# Altium PCB royal_esc.PcbDoc
Units mm, origin at the board's own origin, x right, y up, seen from the top; angles counter-clockwise.
Board outline 41.91 x 30.48 mm, 4 copper layers (Top S.Layer, GND, VCC, Bottom S.Layer), stack 1.571 mm thick; 70 components, 42 nets, 184 pads, 155 vias.
Unrouted connection lines stored in the file: 1.
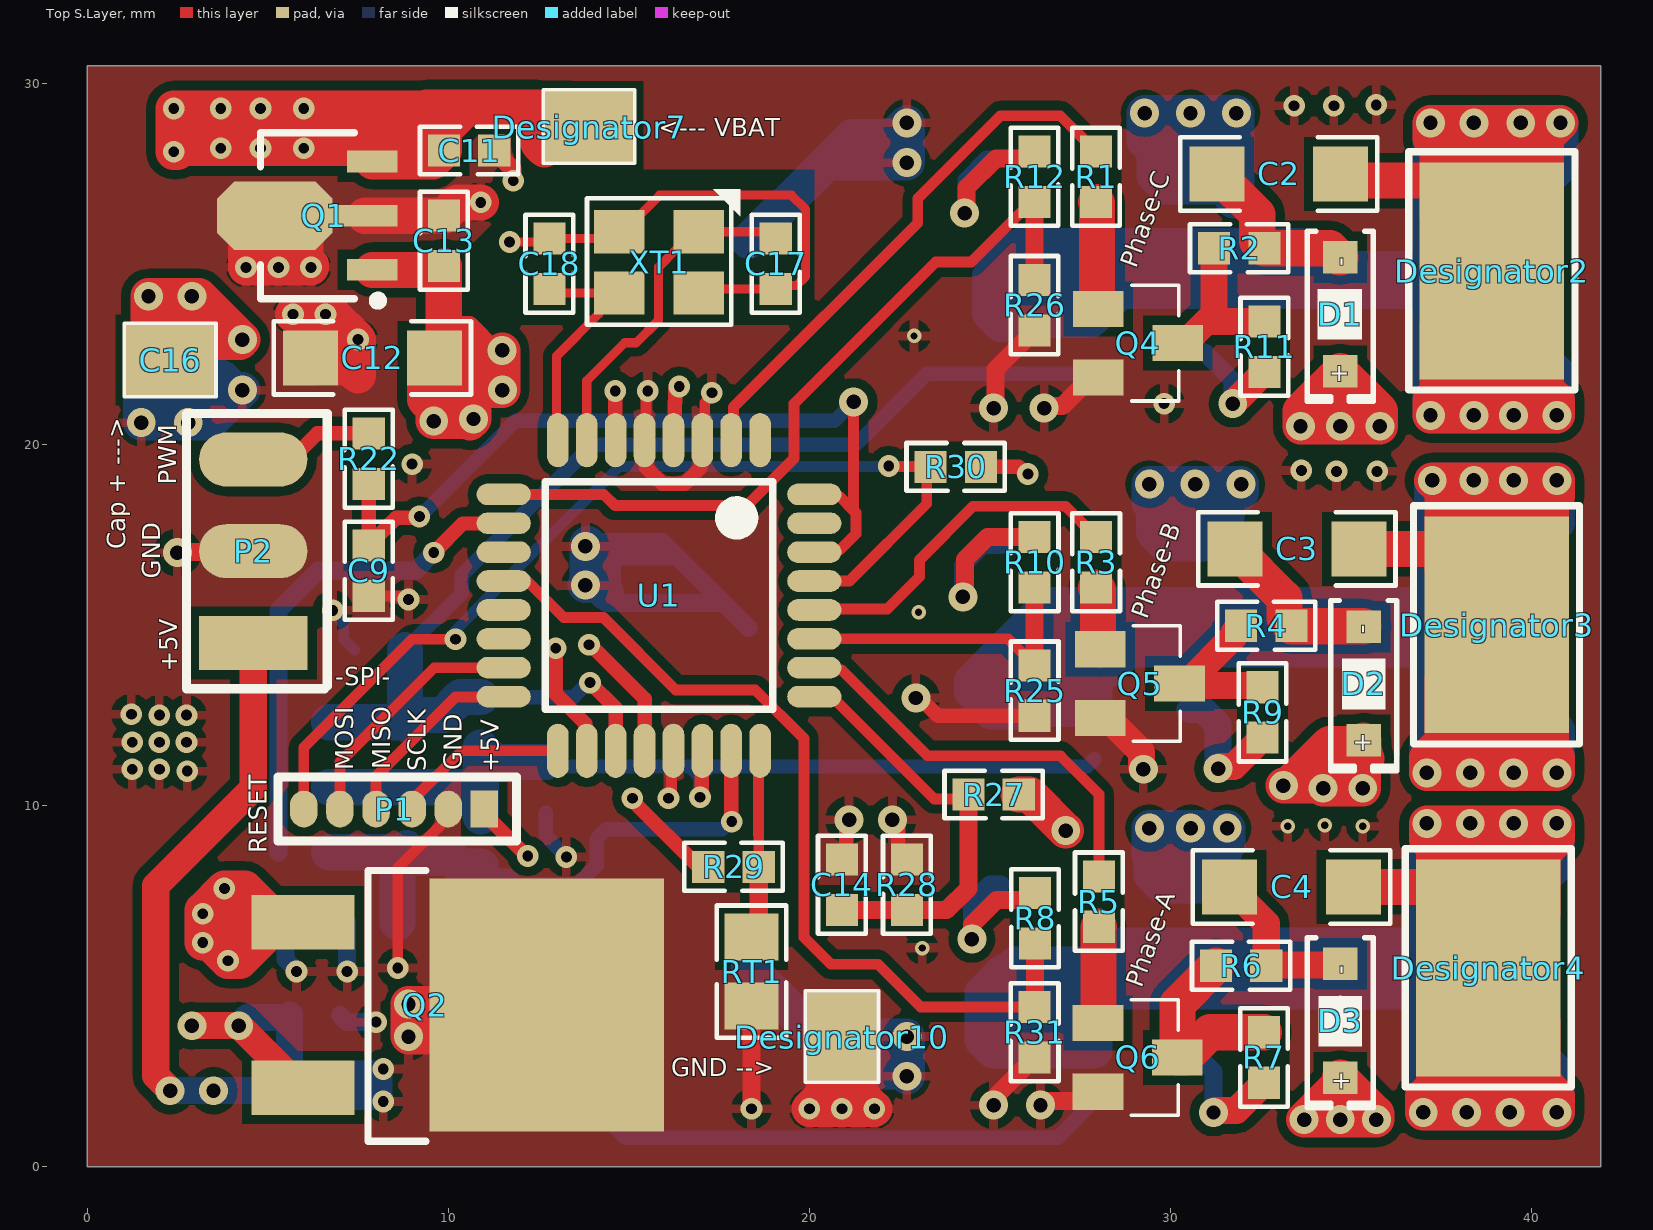
[diagram p0: Top S.Layer view]
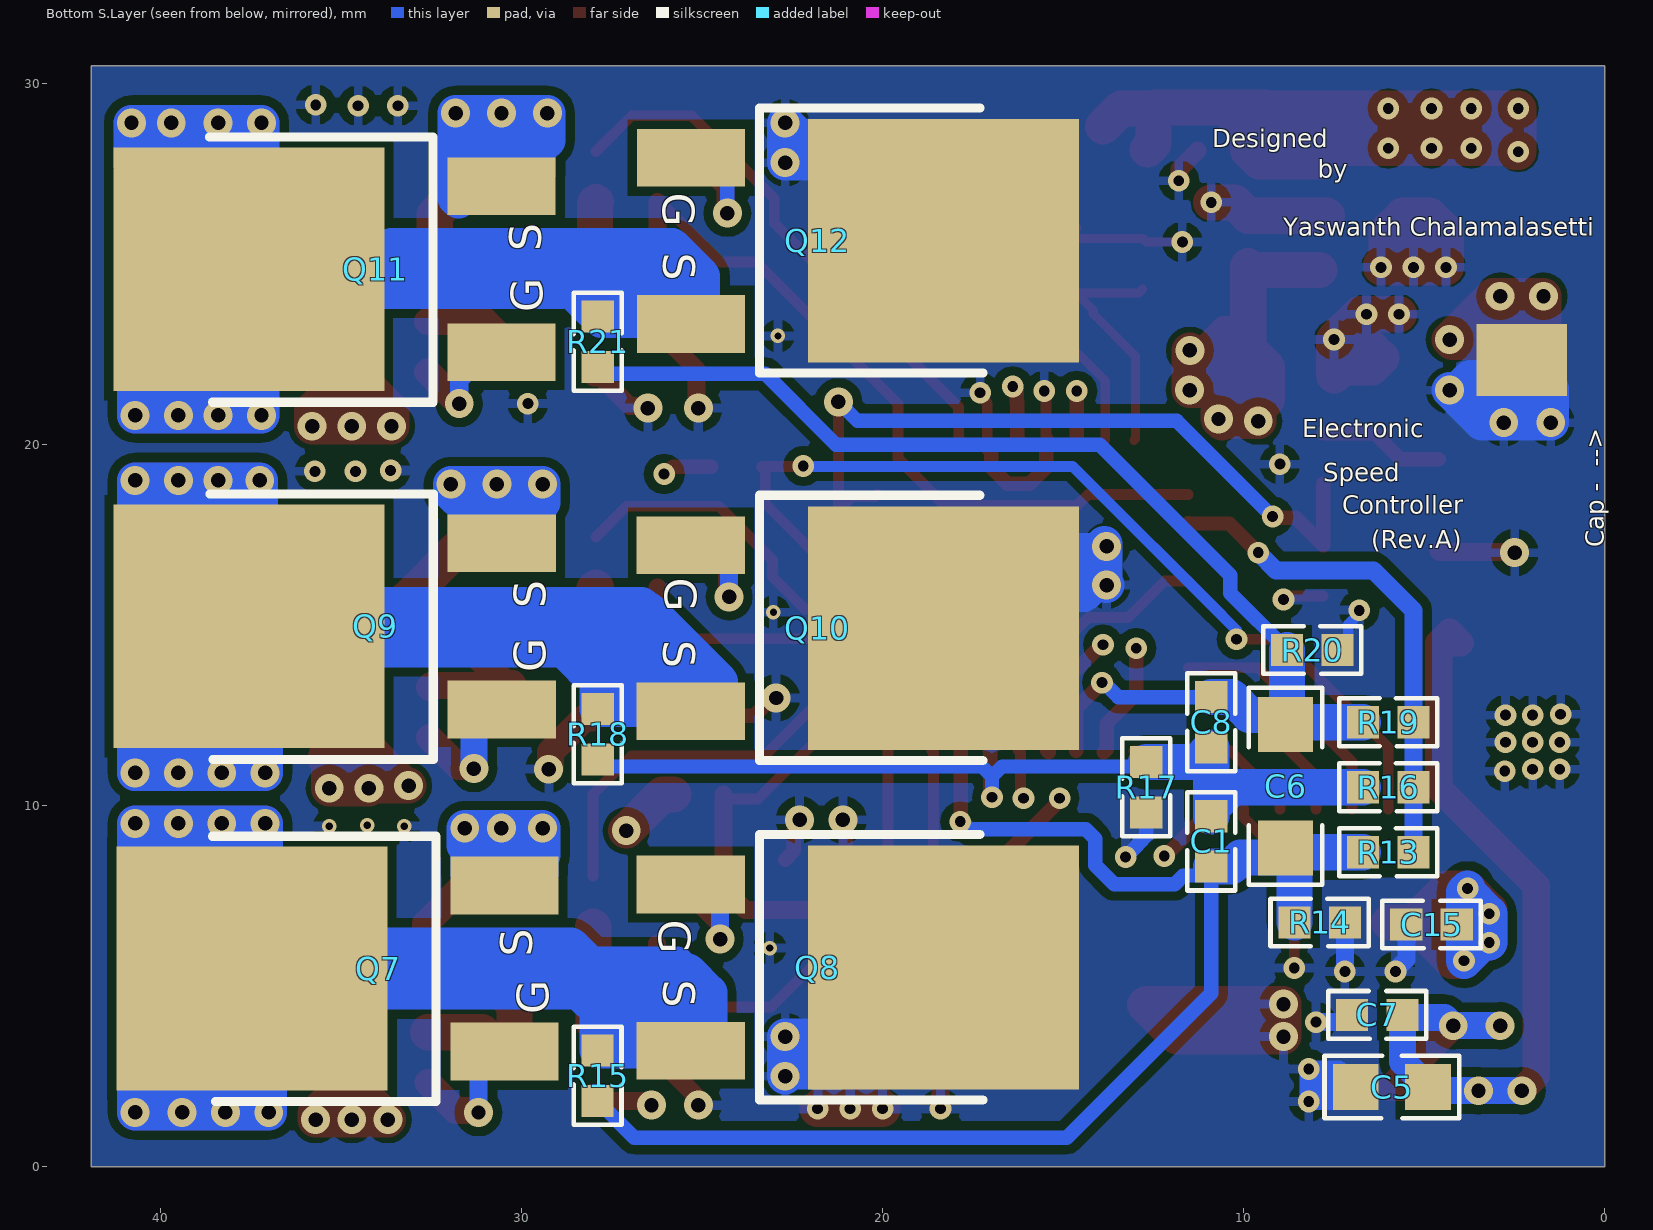
[diagram p1: Bottom S.Layer view, seen from below]
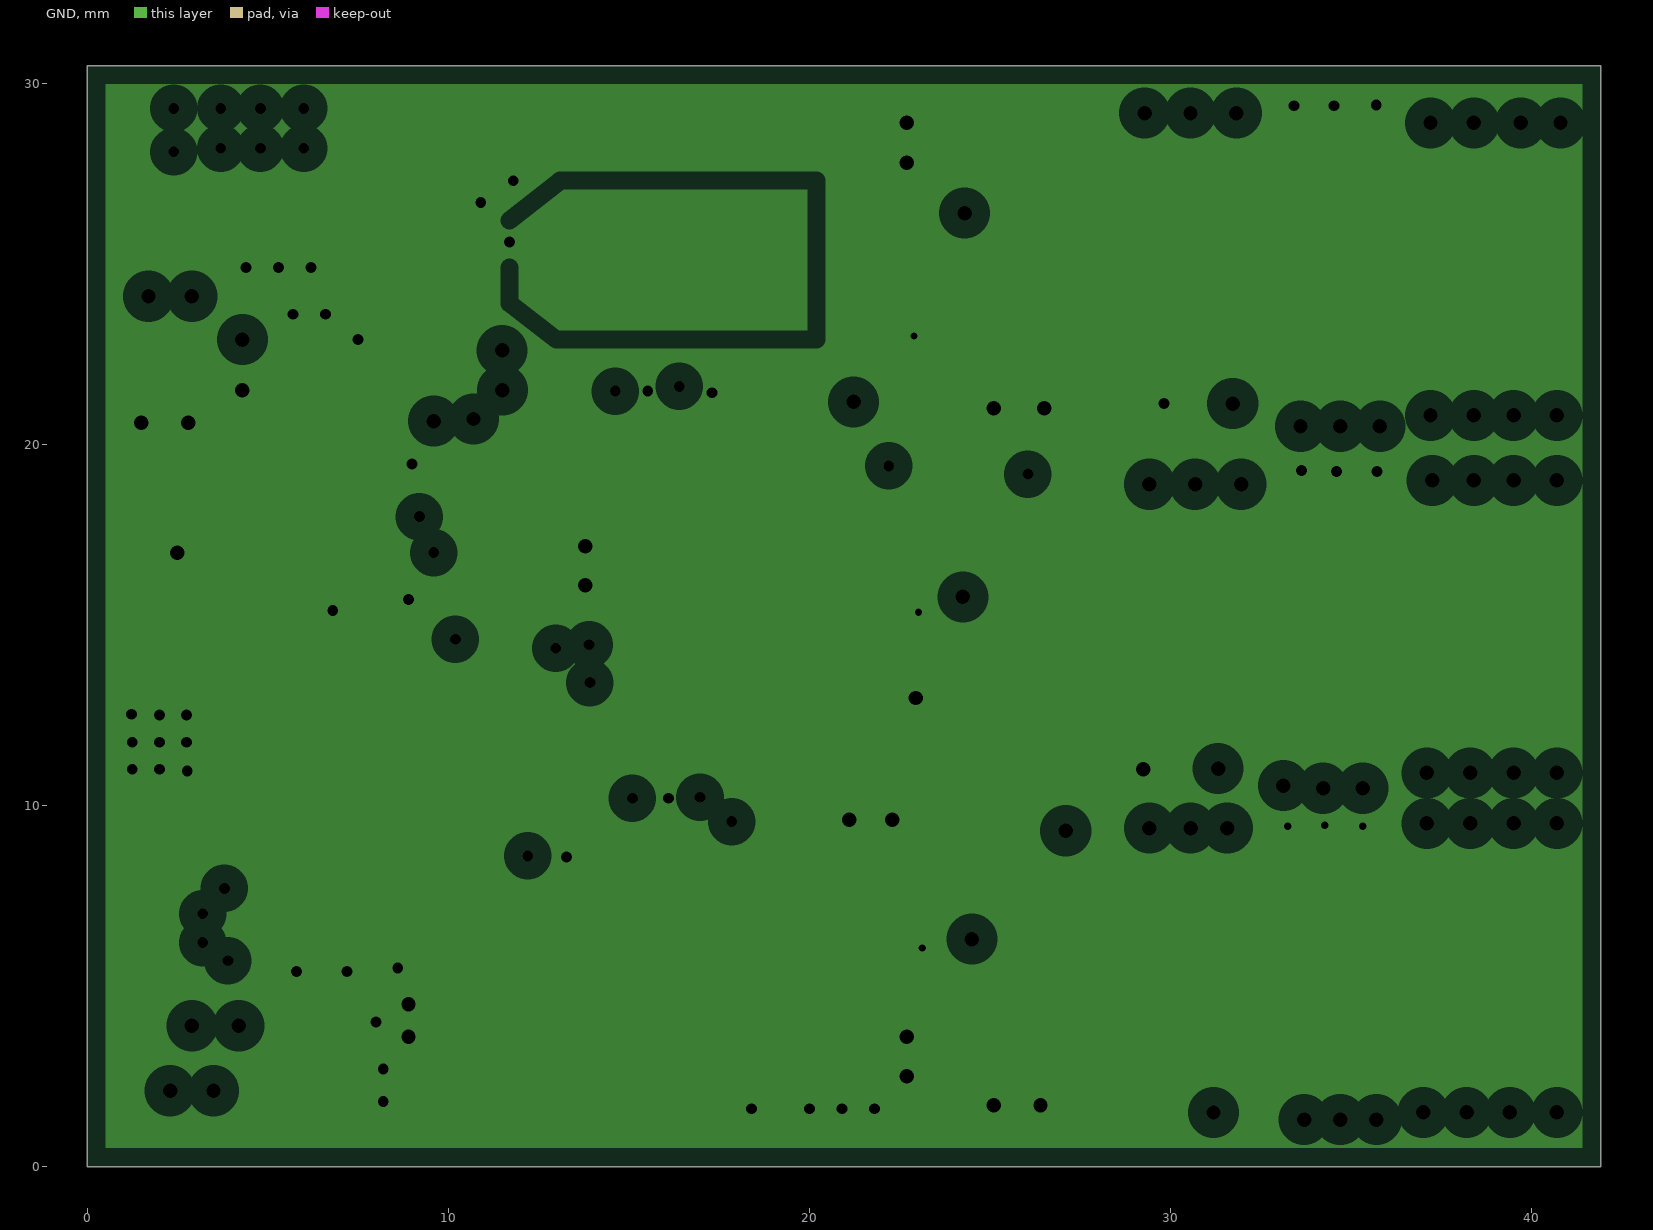
[diagram p2: GND, clearances drawn from the general rule]
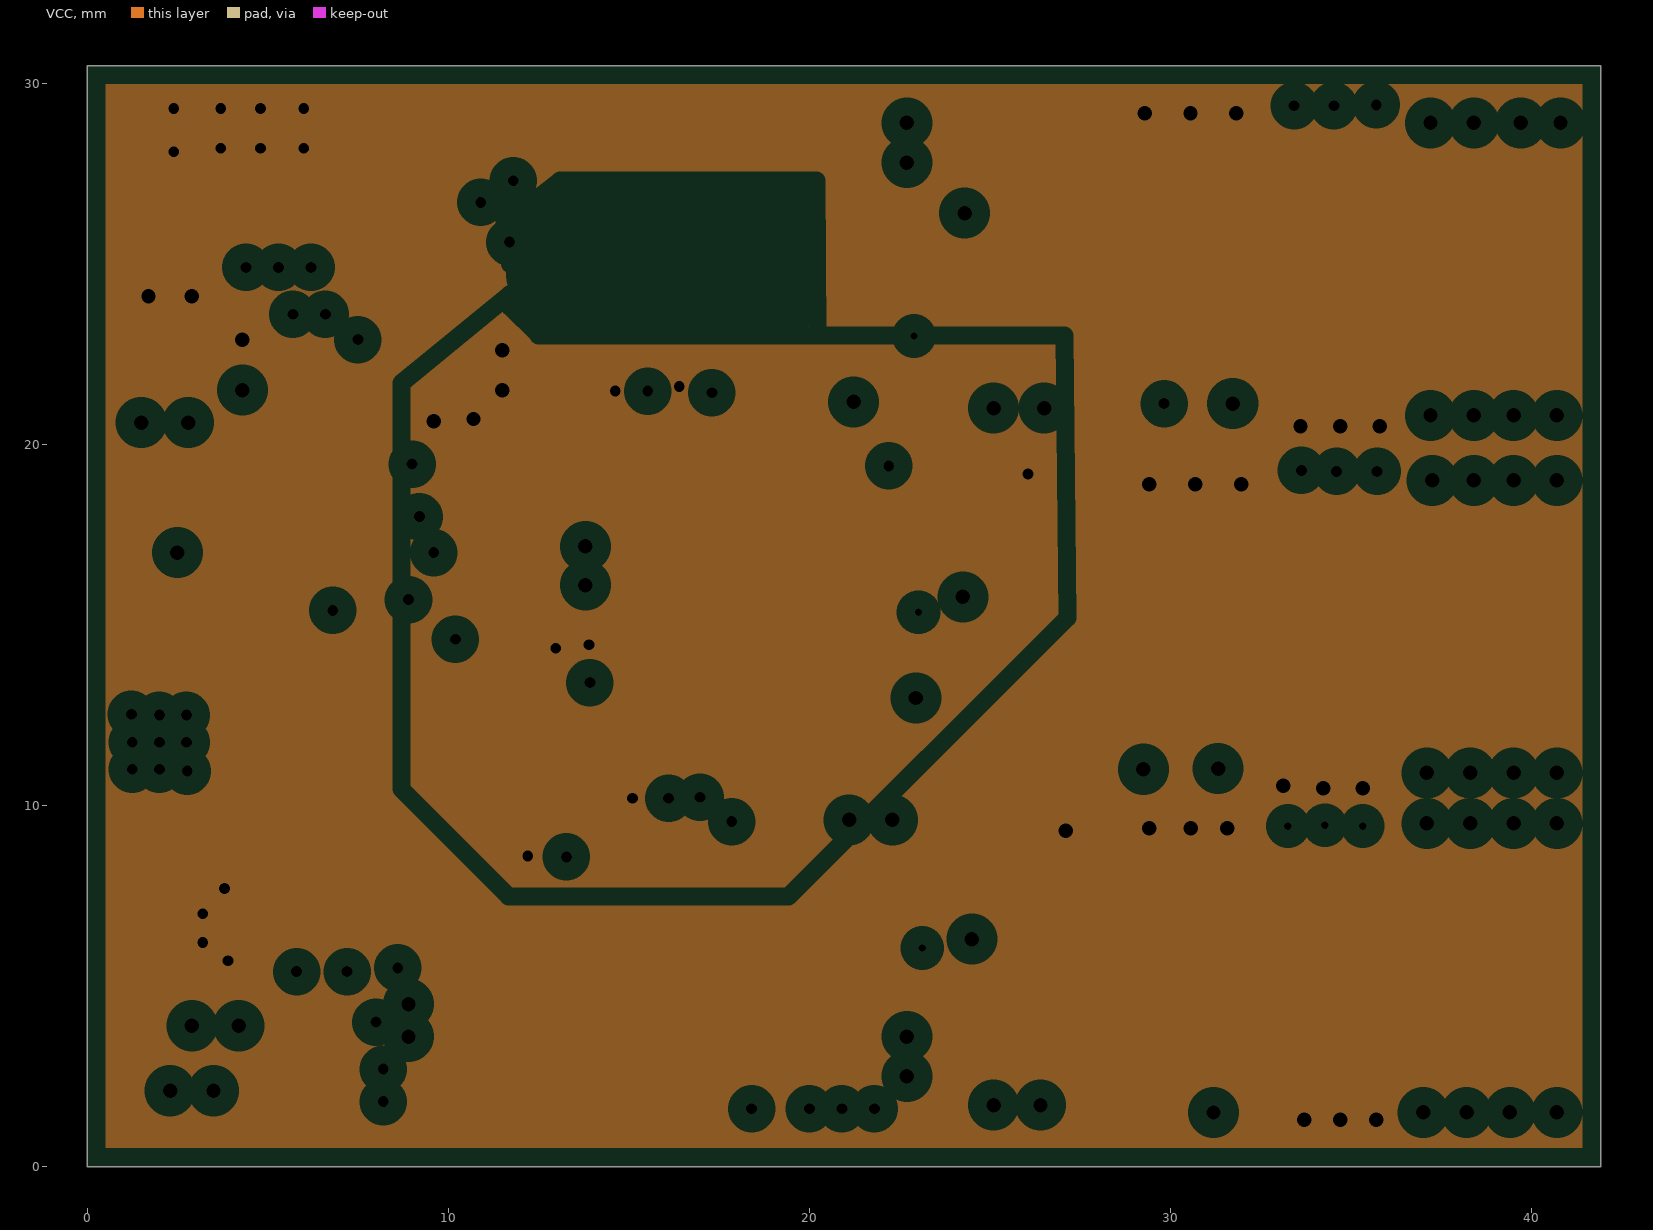
[diagram p3: VCC, clearances drawn from the general rule]
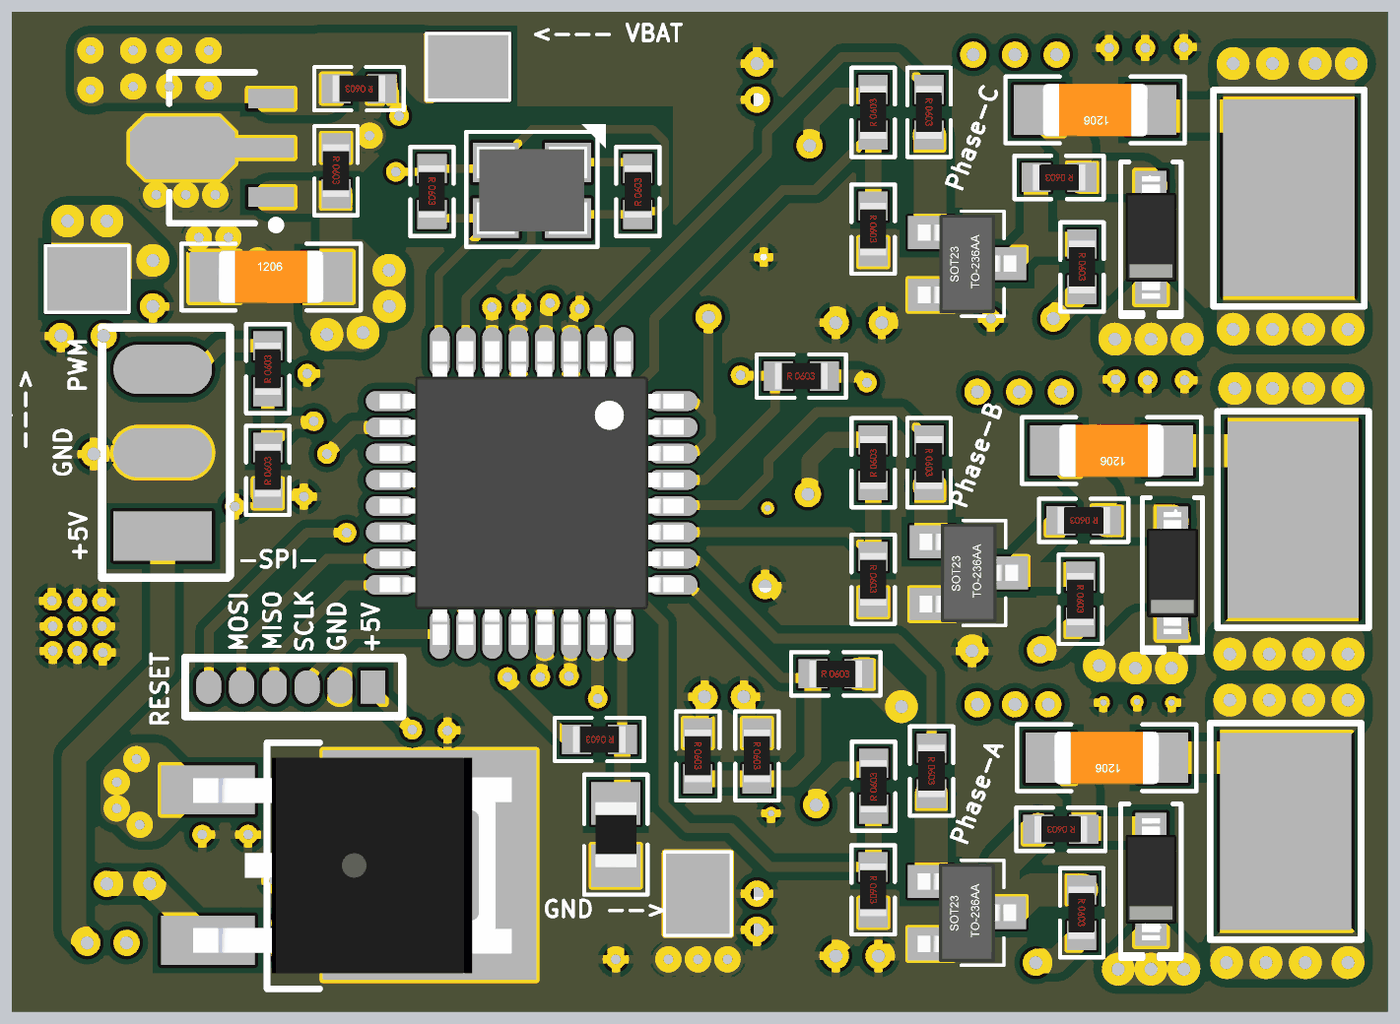
[diagram p4: 3D render of the assembled board from above, using the file's embedded part models]
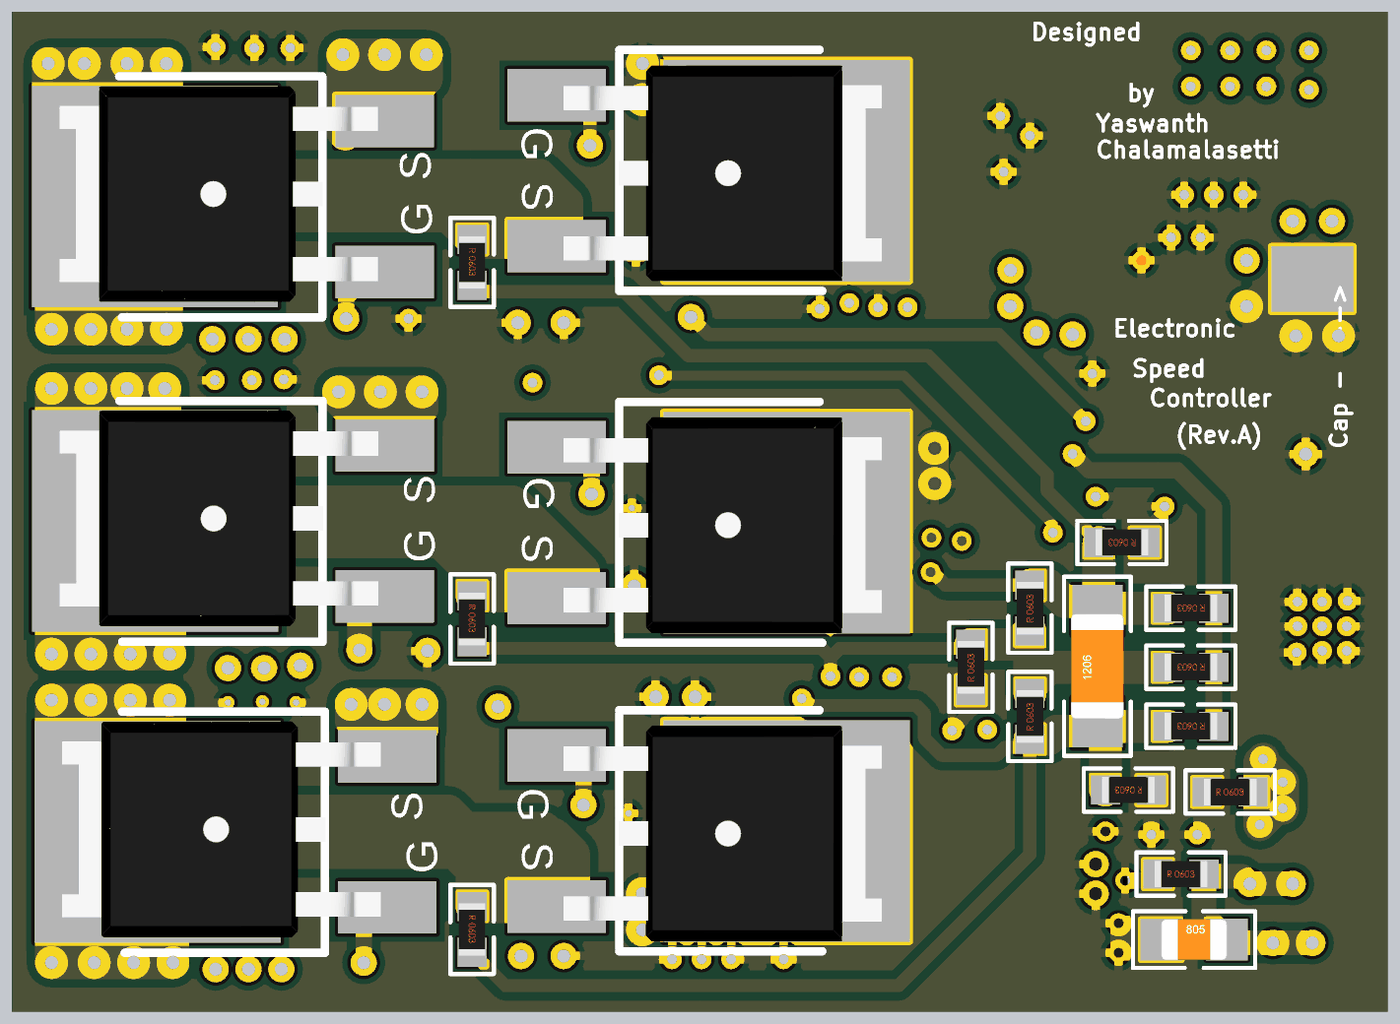
[diagram p5: 3D render of the assembled board from below, using the file's embedded part models]

## Layer stack, top to bottom
Top Solder: solder mask 0.0102, Solder Resist, Dk 3.5
Top S.Layer: signal copper 0.035
Dielectric 2: prepreg 0.2, 7628H, Dk 4.1
GND: plane copper 0.0178, net GND
Dielectric 1: core 1.065, FR-4, Dk 4.5
VCC: plane copper 0.0178, net VBAT
Dielectric 3: prepreg 0.2, 7628H, Dk 4.1
Bottom S.Layer: signal copper 0.035
Bottom Solder: solder mask 0.0102, Solder Resist, Dk 3.5

## Board outline
0,0 41.912,0 41.912,30.48 0,30.48

## Design rules (kind name [scope] priority, off if disabled: settings)
Clearance [All] p1: gap=0.254 ignorepadtopadclearanceinfootprint=TRUE except(0: Arc-Text Arc-Hole Track-Text Track-Hole SMDPad-Text SMDPad-Hole THPad-Text THPad-Hole Via-Text Via-Hole Fill-Text Fill-Hole Poly-Text Poly-Hole Region-Text Region-Hole Text-Text Text-Hole)
HoleSize [All] p1: absolutevalues=TRUE maxlimit=2.54 minlimit=0.9 maxpercent=80.000 minpercent=20.000
PlaneClearance [All] p1: clearance=0.508
PlaneConnect [All] p1: planeconnectstyle=Direct reliefexpansion=0.508 reliefentries=4 reliefconductorwidth=0.254 reliefairgap=0.254
PolygonConnect [All] p1: thpad.connectstyle=Direct thpad.reliefconductorwidth=0.254 thpad.reliefentries=4 thpad.polygonreliefangle="90 Angle" thpad.airgapwidth=0.254 smdpad.connectstyle=Direct smdpad.reliefconductorwidth=0.254 smdpad.reliefentries=4 smdpad.polygonreliefangle="90 Angle" smdpad.airgapwidth=0.254 via.connectstyle=Relief via.reliefconductorwidth=0.254 via.reliefentries=4 via.polygonreliefangle="90 Angle" via.airgapwidth=0.254
RoutingVias [All] p1: holewidth=0.3 width=0.6 viastyle="Through Hole" minholewidth=0.2 minwidth=0.4 maxholewidth=0.4 maxwidth=0.8
SolderMaskExpansion [All] p1: expansion=0.102
UnRoutedNet [All] p1: checkbadconnections=TRUE
Width [All] p1: maxlimit=1 minlimit=0.254 preferedwidth=0.3 minimp=50.000000 maximp=50.000000 favimp=50.000000
26 further rules are at their usual default settings.

## Classes and differential pairs
component class royal_esc: C1 C2 C3 C4 C5 C6 C7 C8 C9 C11 C12 C13 C14 C15 C17 C18 D1 D2 D3 P1 P2 Q1 Q2 Q4 Q5 Q6 Q7 Q8 Q9 Q10 Q11 Q12 R1 R2 R3 R4 R5 R6 R7 R8 R9 R10 R11 R12 R13 R14 R15 R16 R17 R18 R19 R20 R21 R22 R25 R26 R27 R28 R29 R30 R31 RT1 U1 XT1

## Components (designator, comment, footprint, x,y, rotation, side; value= is the part's Value field where it differs from the comment)
C1 "1nF" RES_0603 10.9,9.002 r90 bottom
C2 "5uF" CAP_1206 33,27.481 r180 top
C3 "5uF" CAP_1206 33.5,17.1 r180 top
C4 "5uF" CAP_1206 33.352,7.74 r180 top
C5 "1uF" CAP_0805 5.9,2.2 r180 bottom
C6 "1nF" CAP_1206 8.847,10.53 r90 bottom
C7 "100nF" RES_0603 6.3,4.2 r180 bottom
C8 "1nF" RES_0603 10.9,12.302 r90 bottom
C9 "470pF" RES_0603 7.8,16.501 r90 top
C11 "100nF" RES_0603 10.577,28.133 r180 top
C12 "10uF" CAP_1206 7.9,22.4 r0 top
C13 "100nF" RES_0603 9.879,25.633 r270 top
C14 "100nF" RES_0603 20.9,7.8 r270 top
C15 "330nF" RES_0603 4.801,6.7 r180 bottom
C16 "470uF/25V" 01x01-smd-pad-2.5mmx2mm#1 2.3,22.333 r270 top
C17 "20pF" RES_0603 19.07,24.999 r90 top
C18 "100nF" RES_0603 12.8,24.999 r270 top
D1 "1N4148W" SOD-123 34.7,23.6 r270 top
D2 "1N4148W" SOD-123 35.35,13.375 r270 top
D3 "1N4148W" SOD-123 34.7,4.036 r270 top
Designator2 "Comment" smd-pad-1-6mmx4mm 38.9,24.8 r0 top
Designator3 "Comment" smd-pad-1-6mmx4mm 39.029,15 r0 top
Designator4 "Comment" smd-pad-1-6mmx4mm 38.8,5.5 r0 top
Designator7 "Comment" 01x01-smd-pad-2.5mmx2mm#2 13.9,28.8 r90 top
Designator10 "Comment" 01x01-smd-pad-2.5mmx2mm#2 20.9,3.6 r0 top
P1 "ISP" 01x06-smd-pads-1mm-pitch 11,9.9 r180 top
P2 "CONTROL" Pad-smd-01x03-2.54mm-pitch 4.6,14.5 r90 top
Q1 "L78L05ABUTR" SOT89N 6.1,26.329 r180 top
Q2 "BA7805FP-E2" DPAK_118_446_112X59_SMD 10,4.6 r0 top
Q4 "MMBT3904L" "SOT 23-3" 29.1,22.8 r180 top value=BC817
Q5 "MMBT3904L" "SOT 23-3" 29.15,13.375 r180 top value=BC817
Q6 "MMBT3904L" "SOT 23-3" 29.093,3.02 r180 top value=BC817
Q7 "M3016D" TO-252_181_255_118X62_SMD 31.954,3.147 r90 bottom value=DMN10H099SK3-13
Q8 "M3016D" TO-252_181_255_118X62_SMD 23.826,7.846 r270 bottom value=DMN10H099SK3-13
Q9 "M3016D" TO-252_181_255_118X62_SMD 32.03,12.621 r90 bottom value=DMN10H099SK3-13
Q10 "M3016D" TO-252_181_255_118X62_SMD 23.826,17.244 r270 bottom value=DMN10H099SK3-13
Q11 "M3016D" TO-252_181_255_118X62_SMD 32.039,22.51 r90 bottom value=DMN10H099SK3-13
Q12 "M3016D" TO-252_181_255_118X62_SMD 23.824,27.97 r270 bottom value=DMN10H099SK3-13
R1 "4K7" RES_0603 27.939,27.411 r270 top
R2 "2K2" RES_0603 31.9,25.428 r180 top
R3 "4K7" RES_0603 27.941,16.736 r270 top
R4 "2K2" RES_0603 32.649,14.975 r180 top
R5 "4K7" RES_0603 28.017,7.338 r270 top
R6 "2K2" RES_0603 31.954,5.56 r180 top
R7 "100R" RES_0603 32.589,3.02 r270 top
R8 "100R" RES_0603 26.25,6.875 r90 top
R9 "100R" RES_0603 32.55,12.574 r270 top
R10 "100R" RES_0603 26.239,16.736 r90 top
R11 "100R" RES_0603 32.6,22.7 r270 top
R12 "100R" RES_0603 26.237,27.411 r90 top
R13 "3K3" RES_0603 6,8.702 r0 bottom
R14 "3K3" RES_0603 7.9,6.758 r0 bottom
R15 "18K" RES_0603 27.891,2.512 r270 bottom
R16 "3K3" RES_0603 6,10.502 r0 bottom
R17 "3K3" RES_0603 12.7,10.5 r90 bottom
R18 "18K" RES_0603 27.89,11.974 r270 bottom
R19 "3K3" RES_0603 6,12.302 r0 bottom
R20 "3K3" RES_0603 8.1,14.302 r0 bottom
R21 "18K" RES_0603 27.888,22.839 r270 bottom
R22 "220R" RES_0603 7.8,19.6 r90 top
R25 "10K" RES_0603 26.239,13.18 r270 top
R26 "10K" RES_0603 26.237,23.855 r270 top
R27 "220K" RES_0603 25.1,10.3 r0 top
R28 "51K" RES_0603 22.7,7.8 r270 top
R29 "820R" RES_0603 17.9,8.3 r180 top
R30 "10K" RES_0603 24.05,19.375 r0 top
R31 "10K" RES_0603 26.239,3.718 r270 top
RT1 "10K_NTC" RES_0805 18.4,5.4 r90 top
U1 "ATMEGA8L-8AUR" TQFP-32 15.836,15.813 r270 top
XT1 "16Mhz" 3225_4P_67_157_55x47_SMD 16.942,25.888 r180 top

## Footprints (in the part's own frame and the unit in brackets; to place one, negate y for a bottom-side part, rotate by r counter-clockwise, add the part's x,y. Pads: shape width x height; smd on the part's side, far side on the other; paste and mask are expansions set on the pad)
01x01-smd-pad-2.5mmx2mm#1 [mm]
  rect 2x2.5 smd: A1(0,0)
  rect 2x2.5 smd far side: B1(0,0)
  silkscreen extent -1.02,-1.27 1.02,1.27
01x01-smd-pad-2.5mmx2mm#2 [mm]
  rect 2x2.5 smd: A1(0,0)
  silkscreen extent -1.02,-1.27 1.02,1.27
01x06-smd-pads-1mm-pitch [mil]
  rect 30x40 smd: A1(0,0)
  oval 30x40 smd: A2(39.37,0) A3(78.74,0) A4(118.11,0) A5(157.48,0) A6(196.85,0)
  silkscreen extent -35,-35 225,35
3225_4P_67_157_55x47_SMD [mm] "XTAL"
  rect 1.4x1.2 smd: 1(0,0) 2(2.2,0) 3(2.2,1.7) 4(0,1.7)
  silkscreen extent -1.15,-1.18 3.1,2.57, body extent -0.58,-0.48 2.78,2.18, height 0.9
CAP_0805 [mm] "Ceramic Capacitor"
  rect 1.27x1.27 smd mask+0.076: 1(-1,0) 2(1,0)
  silkscreen extent -1.86,-0.86 1.86,0.86, body extent -1,-0.62 1,0.63, height 0.78
CAP_1206 [mil] "Ceramic Capacitor"
  rect 60x60 smd: 1(-67.49,-0.2) 2(67.51,-0.2)
  silkscreen extent -107,-40 108,40, body extent -63,-31 63,32, height 39
DPAK_118_446_112X59_SMD [mm] "CASE: DPAK"
  rect 2.85x1.5 smd: 1(-4.023,2.163) 3(-4.023,-2.417)
  rect 6.5x7 smd: 2(2.727,-0.127)
  silkscreen extent -2.22,-3.9 -0.62,3.6, body extent -4.47,-3.43 5.23,3.15, height 2.3
Pad-smd-01x03-2.54mm-pitch [mm]
  rect 1.499x3 smd: A1(0,0)
  oval 1.499x3 smd: A2(2.54,0) A3(5.08,0)
  silkscreen extent -1.27,-2.05 6.35,1.85
RES_0603 [mil] "CASE: 0603"
  rect 35x35 smd mask+3: 1(-27.5,0) 2(27.5,0)
  silkscreen extent -53,-26 54,26, body extent -32,-16 31,16, height 18
RES_0805 [mm] "Resister"
  rect 1.3x1.5 smd mask+0.076: 1(0.95,0) 2(-0.95,0)
  silkscreen extent -1.83,-0.97 1.83,0.97, body extent -1,-0.63 1,0.62, height 0.5
smd-pad-1-6mmx4mm [mm]
  rect 4x6 smd: A1(0,0)
  silkscreen extent -2.3,-3.3 2.3,3.3
SOD-123 [mm] "SOD, 2-Leads, Body 1.55x3.70mm, IPC Medium Density"
  rect 0.9x0.95 smd: 1(-1.575,0) 2(1.575,0)
  silkscreen extent -2.3,-0.92 2.41,0.92, body extent -1.86,-0.78 1.86,0.77, height 1.35
SOT89N [mm] "SOT89, 3-Leads, Body 4.5x2.4 mm, Pitch 1.5mm, Lead Span 4.1mm, IPC Medium Density"
  rect 1.4x0.6 smd: 1(-1.8,1.5) 3(-1.8,-1.5)
  rect 1.8x0.6 smd: 2(-1.6,0)
  oct 3.2x1.9 smd: 2(0.9,0)
  silkscreen extent -2.07,-2.3 1.3,2.47, body extent -1.3,-2.3 1.3,2.3, height 1.6
"SOT 23-3" [mm] "Case: SOT23"
  rect 1.4x1 smd paste+0 mask+0.076: 1(1.1,-0.95) 2(1.1,0.95) 3(-1.1,0)
  silkscreen extent -1.12,-1.6 0.18,1.6, body extent -1.5,-1.5 1.5,1.5, height 1.3
TO-252_181_255_118X62_SMD [mm] "CASE: TO-252"
  rect 1.6x3 smd: 1(0.037,-1.484) 2(4.637,-1.484)
  rect 6.75x7.5 smd: 3(2.337,5.512)
  silkscreen extent -1.35,0.42 6,6.6, body extent -0.88,-1.28 5.7,8.42, height 2.31
TQFP-32 [mm] "TQFP, 32-Leads, Body 7.10x7.10mm, Pitch 0.80mm, IPC Medium Density"
  oval 1.5x0.6 smd mask+0.076: 1(-4.3,2.8) 2(-4.3,2) 3(-4.3,1.2) 4(-4.3,0.4) 5(-4.3,-0.4) 6(-4.3,-1.2) 7(-4.3,-2) 8(-4.3,-2.8) 17(4.3,-2.8) 18(4.3,-2) 19(4.3,-1.2) 20(4.3,-0.4) 21(4.3,0.4) 22(4.3,1.2) 23(4.3,2) 24(4.3,2.8)
  oval 0.6x1.5 smd mask+0.076: 9(-2.8,-4.3) 10(-2,-4.3) 11(-1.2,-4.3) 12(-0.4,-4.3) 13(0.4,-4.3) 14(1.2,-4.3) 15(2,-4.3) 16(2.8,-4.3) 25(2.8,4.3) 26(2,4.3) 27(1.2,4.3) 28(0.4,4.3) 29(-0.4,4.3) 30(-1.2,4.3) 31(-2,4.3) 32(-2.8,4.3)
  silkscreen extent -3.15,-3.15 3.15,3.15, body extent -4.62,-4.62 4.63,4.63, height 1.2

## Part data
C1 C2 C3 C4 C5 C6 C7 C8 C9 C11 C12 C13 C14 C15 C17 C18: library part Cap, "Capacitor"
C16: library part "Cap Pol1", "CAP ALUM 470UF 20% 25V RADIAL"
D1 D2 D3: library part Diode, "Default Diode", Code_JEDEC=DO-214-AB, LatestRevisionDate=17-Jul-2002, LatestRevisionNote="Re-released for DXP Platform.", PackageDescription="DO-214-AB/SMC; 2 C-Bend Leads; Body 7.9 x 5.9 mm, inc. leads (LxW)", PackageReference=SMC, PackageVersion=Sep-1996, Published=8-Jun-2000, Publisher="Altium Limited"
P1: library part "Header 6", "Header, 6-Pin", LatestRevisionDate=17-Jul-2002, LatestRevisionNote="Re-released for DXP Platform.", Publisher="Altium Limited"
P2: library part "Header 3", "Header, 3-Pin", LatestRevisionDate=17-Jul-2002, LatestRevisionNote="Re-released for DXP Platform.", Publisher="Altium Limited"
Q1: library part 78L05, "IC REG LINEAR 5V 100MA SOT89-3"
Q2: library part 78M05, "IC REG LINEAR 5V 500MA DPAK"
Q4 Q5 Q6: "TRANS NPN 40V 0.2A SOT23", ComponentLink4Description=BC817-40, ComponentLink5Description=BC817-40LT1G, DepoStok=48430.00000, EK1=45V, EK2=500mA, Kilif=SOT-23, Marka_1=PHILIPS, Marka_2=NXP, Marka_3=On-Semiconductor, Max_Fiyat=0.100, Min_Fiyat=0.029, ModelNo_1=BC817-40, ModelNo_2=BC817-40, ModelNo_3=BC817-40LT1G, Montaj=SMD, Ongoru_Fiyat=0.032, Ort_Fiyat=0.052, Sinif=TRANS, Stok Kodu=265402, Tipi=NPN
Q7 Q8 Q9 Q10 Q11 Q12: "N-Ch 30V Fast Switching MOSFETs", ComponentLink3Description=DMN10H099SK3-13, DepoStok=44.00000, EK1=100V, EK2=17A, Kilif=D-PAK, Marka_1=DIODES, Max_Fiyat=1.488, Min_Fiyat=1.488, ModelNo_1=DMN10H099SK3-13, Montaj=SMD, Ort_Fiyat=1.488, Sinif=TRANS, Stok Kodu=266751, Tipi=N-MOS
R1 R2 R3 R4 R5 R6 R7 R8 R9 R10 R11 R12 R13 R14 R15 R16 R17 R18 R19 R20 R21 R22 R25 R26 R27 R28 R29 R30 R31: library part R, "Resistor"
RT1: library part "Res Thermal", "Thermistor", Code_IPC=RESC2012, LatestRevisionDate=29-May-2009, LatestRevisionNote="IPC-7351 Footprint Added.", PackageDescription="Chip Resistor 0805 Case Size", PackageReference=6-0805, PackageVersion=Mar-2003, Published=24-Mar-1999, Publisher="Altium Limited"
U1: library part ATMEGA8L, "IC MCU 8BIT 8KB FLASH 32TQFP"
XT1: library part XTAL_12MHZ-X322512MSB4SI, "16MHz ±10ppm 20pF 80O SMD-3225_4P SMD Crystal Resonators RoHS", Alternate Part Number-1=NA, Case/Package=SMD, Manufacturer=CTS, Manufacturer Part Number=X322512MSB4SI, Supplier-1=ARROW, Supplier Part Number-1=X322512MSB4SI

## Via types
v1: diameter 0.8, hole 0.4, Top S.Layer to Bottom S.Layer, 81 vias
v2: diameter 0.6, hole 0.3, Top S.Layer to Bottom S.Layer, 68 vias
v3: diameter 0.4, hole 0.2, Top S.Layer to Bottom S.Layer, 6 vias

## Nets (pads, with @x,y where several pads share a name; then routed paths per layer and width w, separated by ;. In a path a pad name is that pad's centre, name@x,y a point inside that pad or via, vN(x,y) a via of type N, cw(c..) or ccw(c..) an arc to the next point about the centre after c; other vN are vias at no path point)
+5V: C12.2 C13.2 P1.A1 Q1.1 R29.2 R30.2 U1.4 U1.6 U1.18 U1.20 | length 33.7
  Top S.Layer w0.4: P1.A1 11,9.773 12.173,8.6 v2(12.2,8.6) ; v2(12.975,14.35) 12.975,13.091 13.798,12.268 13.798,11.552 U1.18 U1.18@13.874,11.475 ; v2(13.9,14.45) 13.941,14.45 15.436,12.955 U1.20 U1.20@15.398,11.475 ; v2(14.625,21.475) 14.63,21.469 14.63,20.119 U1.6 ; v2@15.1,10.254 v2(15.1,10.2) 15.138,10.162 15.138,10.095 16.934,8.3 R29.2 ; U1.4 16.274,20.152 16.274,21.158 16.283,21.167 16.283,21.485 v2(16.399,21.601) ; R30.2 25.796,19.375 25.996,19.175 v2(26.05,19.175)
  Top S.Layer w0.5: 9.876,23.3 10.587,23.3 v1@11.287,22.6
  Top S.Layer w1: Q1.1 9.773,24.829 C13.2 9.879,24.659 9.876,24.657 9.876,23.3 C12.2@9.876,22.657 ; v1@11.3,21.7 10.5,22.5 ; v1(11.493,22.6) 11.5,22.593 v1(11.5,21.5) 10.9,21.5 10.5,21.1 ; C12.2 9.876,22.133 9.876,21.424 10.6,20.7 v1(10.7,20.7) ; C12.2 9.352,22.133 9.352,21.239 9.6,20.992 v1(9.6,20.64) 10.56,20.64 10.6,20.6 v1(10.7,20.7) ; C12.2 C12.2@9.876,22.657 ; C12.2@9.876,22.657 9.876,22.6 10.4,22.6 10.5,22.5 ; 10.5,21.1 10.5,22.5 ; 10.5,21.1 10.7,20.9 v1(10.7,20.7)
A+: R5.1 U1.26 | length 11.6
  Top S.Layer w0.3: U1.26 20.193,13.756 20.889,13.756 23.27,11.375 26.95,11.375 28.017,10.308 R5.1
A-: R8.1 R31.1 U1.12 | length 24.6
  Top S.Layer w0.3: U1.12 12.187,16.213 13.2,15.2 14.3,15.2 16.3,13.2 18.504,13.2 19.852,11.852 19.85,11.85 19.85,6.35 20.6,5.6 21.9,5.6 23.083,4.417 R31.1
  Top S.Layer w0.5: R31.1 26.244,4.422 26.244,6.171 R8.1
ADC1: R29.1 RT1.1 U1.24 | length 5.3
  Top S.Layer w0.3: RT1.1 RT1.1@18.598,6.549 ; R29.1 18.598,9.198 18.596,9.2 18.596,11.473 U1.24
  Top S.Layer w0.5: RT1.1@18.598,6.549 R29.1
ADC2: C14.2 R27.1 R28.2 U1.25 | length 11.7
  Top S.Layer w0.3: U1.25 20.619,13.013 23.457,10.175 R27.1@24.352,10.175
  Top S.Layer w0.5: C14.2 R28.2 23.801,7.101 24.402,7.702 R27.1
B+: R3.1 U1.28 | length 9.6
  Top S.Layer w0.3: U1.28 20.163,15.441 22.159,15.441 23.05,16.332 23.05,16.8 24.533,18.283 27.092,18.283 R3.1
B-: R10.1 R25.1 U1.27 | length 8.6
  Top S.Layer w0.3: U1.27 25.504,14.613 R25.1
  Top S.Layer w0.5: R25.1 R10.1
C+: R1.1 U1.2 | length 15.1
  Top S.Layer w0.3: U1.2 17.893,20.171 17.893,20.693 17.9,20.7 17.9,21.029 23,26.129 23,26.804 25.296,29.1 26.949,29.1 R1.1
C-: R12.1 R26.1 U1.9 | length 21.3
  Top S.Layer w0.3: U1.9 14.308,18.613 14.616,18.305 18.274,18.305 19.575,19.607 19.575,21.124 23.5,25.049 24.483,25.049 R12.1@26.147,26.713
  Top S.Layer w0.5: R26.1 R12.1
CENTER: R13.1 R16.1 R19.1 U1.10 | length 13.9
  Top S.Layer w0.4: v2(9.6,17) 10.407,17.807 11.529,17.807 U1.10
  Bottom S.Layer w0.5: R13.1 R16.1 R19.1 5.302,15.402 6.404,16.504 9.104,16.504 v2(9.6,17)
EXT_+5V: C5.2 C7.2 P2.A1 Q2.3 | length 29
  Top S.Layer w0.75: v1(2.3,2.1) 2.3,2.114 1.9,2.514 1.9,7.775 4.6,10.475 P2.A1 ; v1(2.9,3.9) v1(4.2,3.9) 4.214,3.9 5.914,2.2 Q2.3@5.358,2.2 ; Q2.3 5.375,2.183 Q2.3@5.358,2.2 ; P2.A1 4.3,14.8 4,14.5 P2.A1 ; Q2.3@5.358,2.2 5,2.558 5,2.2 Q2.3@5.358,2.2
  Bottom S.Layer w0.75: v1(2.3,2.1) v1(3.5,2.1) 3.51,2.11 4.809,2.11 C5.2 5.601,2.902 C7.2 5.532,4.13 4.444,4.13 4.214,3.9 v1(4.2,3.9) v1(2.9,3.9)
GND: C5.1 C7.1 C9.1 C11.1 C12.1 C13.1 C14.1 C15.1 C16.B1 C17.1 C18.1 Designator10.A1 P1.A2 P2.A2 Q1.2 Q2.2 Q4.2 Q5.2 Q6.2 Q8.3 Q10.3 Q12.3 R14.1 R17.1 R20.1 R25.2 R26.2 R28.1 R31.2 RT1.2 U1.3 U1.5 U1.21 XT1.2 XT1.4 | length 142.7
  Top S.Layer w0.254: v2(11.7,25.6) 12.703,25.6 C18.1 14.551,25.697 XT1.2 14.842,25.888 15.854,26.9 19.5,26.9 19.895,26.505 19.895,24.644 19.651,24.4 19.17,24.4 C17.1 17.054,24.3 XT1.4
  Top S.Layer w0.3: C9.1 8.716,15.802 8.819,15.7 v2(8.9,15.7) ; v2(8.6,5.5) 8.6,8.263 10,9.663 P1.A2 ; XT1.2@14.642,25.988 XT1.2 ; U1.5 15.48,20.158 15.48,21.43 v2(15.525,21.475) ; v2(16.1,10.2) 16.1,10.281 16.179,10.36 16.179,11.456 U1.21 ; U1.3@16.998,19.717 17.104,19.823 17.104,21.148 17.3,21.344 v2(17.3,21.425)
  Top S.Layer w0.4: U1.5 15.474,20.075 15.474,19.359 15.924,18.909 16.548,18.909 16.998,19.359 U1.3@16.998,19.717 ; C14.1 21.023,8.622 21.023,9.523 v1(21.1,9.6) ; v1(22.3,9.6) 22.3,9.492 22.455,9.336 22.455,8.743 R28.1 ; v1(22.95,12.975) 23.058,12.975 23.552,12.481 R25.2
  Top S.Layer w0.5: v1(2.5,17) 2.52,17.02 4.58,17.02 P2.A2 ; C11.1 11.781,27.627 11.781,27.319 v2(11.8,27.3) ; v2(18.4,1.6) RT1.2 ; v1(25.1,1.7) 25.157,1.757 25.157,1.938 R31.2 ; v1(25.1,21) 25.157,21.057 25.157,22.077 R26.2 ; v1(26.4,1.7) 26.481,1.7 26.601,1.82 27.743,1.82 Q6.2 ; v1(26.5,21) 26.557,21.057 27.008,21.057 27.8,21.85 Q4.2
  Top S.Layer w0.75: Q5.2 28.25,12.425 29.193,11.482 29.193,11.057 v1(29.25,11)
  Top S.Layer w1: v2(5.7,23.6) v2(6.6,23.6) 6.8,23.6 v2(7.5,22.9) ; C12.1 C12.1@6.447,22.133 ; Q1.2@7.7,26.329 9.876,26.329 C13.1 10.247,26.7 v2(10.9,26.7) ; Q1.2@4.85,26.329 5.3,25.879 v2(5.3,24.9) ; Q1.2@4.85,26.329 5.2,26.329 5.596,26.329 6.046,25.879 6.046,25.133 6.2,24.979 v2(6.2,24.9) v2(5.3,24.9) ; Q1.2@4.85,26.329 4.4,25.879 v2(4.4,24.9) v2(5.3,24.9) ; C12.1@6.447,22.133 6.447,22.657 6.971,22.657 7.214,22.9 v2(7.5,22.9) ; C12.1@6.447,22.133 7.267,22.133 7.5,21.9 v2(7.5,22.9) ; v2(20.9,1.6) Designator10.A1 ; v2(20.9,1.6) v2(21.8,1.6) 21.4,2 21.4,3.1 Designator10.A1 ; v2(20.9,1.6) v2(20,1.6) 20.4,2 20.4,3.1 Designator10.A1 ; v1(8.9,3.6) v1(8.9,4.5) 12.7,4.5 Q2.2 11.854,3.6 v1(8.9,3.6)
  Bottom S.Layer w0.3: v2(6.8,15.4) 6.8,15.319 7.107,15.012 7.107,14.597 R20.1
  Bottom S.Layer w0.4: R17.1 12.7,9.166 12.954,8.912 12.954,8.891 v2(13.272,8.572)
  Bottom S.Layer w0.5: C15.1 5.499,5.728 5.8,5.427 v2(5.8,5.4) ; C7.1 7.198,4 v2(8,4) ; v2@7.201,5.401 R14.1@7.201,6.757 ; v1(13.8,17.171) 13.8,17.219 v1@13.881,17.3 ; 14.364,15.9 14.364,15.6 Q10.3@17.621,15.6 ; Q10.3 Q10.3@17.621,15.6 ; C5.1@7.281,1.819 C5.1@7.281,2.581 ; C5.1@7.281,1.819 7.731,1.819 ; C5.1@7.281,1.819 C5.1 C5.1@7.281,2.581 ; C5.1@7.281,2.581 C5.1@7.285,2.585 ; C5.1@7.285,2.585 C5.1@7.381,2.681 ; C5.1@7.285,2.585 C5.1@7.415,2.585 ; C5.1@7.381,2.681 v2@8.154,2.681 ; C5.1@7.381,2.681 7.381,2.619 C5.1@7.415,2.585 ; C5.1@7.415,2.585 7.764,2.236 ; C5.1@7.415,2.585 8.058,2.585 v2@8.154,2.681 ; 7.731,1.819 7.731,2.204 7.764,2.236 ; 7.731,1.819 v2@8.181,1.819 ; 7.764,2.236 v2@8.2,2.673 ; 7.764,2.236 v2@8.181,1.819 ; v2@8.154,2.681 8.181,2.681 v2(8.2,2.7) v2@8.2,2.673 ; v2@8.181,1.819 v2(8.2,1.8) v2@8.2,2.673 ; v1@13.881,17.3 14.281,16.9 Q10.3@16.321,16.9 ; v1@13.881,17.3 15.921,17.3 Q10.3@16.321,16.9 ; Q10.3@16.321,16.9 Q10.3@17.621,15.6
  Bottom S.Layer w1: v1(13.8,16.1) 13.864,16.164 v1@13.864,17.236 ; 14.281,16.9 14.281,15.983 14.364,15.9 ; Q12.3 Q12.3@20.479,27.8 ; Q8.3 Q8.3@20.223,3.6 ; v1@1.5,20.7 1.5,21.533 1.55,21.583 1.55,21.833 2.05,22.333 C16.B1 C16.B1@2.8,21.833 ; v1@1.5,20.7 v1(1.5,20.6) v1(2.8,20.6) ; v1@1.5,20.7 2.1,21.3 2.8,21.3 ; v1(2.8,20.6) 2.8,21.3 ; v1(2.8,20.6) 3.4,20.6 3.8,21 ; 2.8,21.3 3.5,21.3 3.8,21 ; 2.8,21.3 C16.B1@2.8,21.833 ; C16.B1@2.8,21.833 3.735,21.833 4.068,21.5 v1(4.3,21.5) 3.8,21 ; Q8.3@20.223,3.6 21.189,2.634 22.566,2.634 v1(22.7,2.5) v1(22.7,3.6) Q8.3@20.223,3.6 ; Q12.3@20.479,27.8 21.187,28.508 22.308,28.508 v1(22.7,28.9) v1(22.7,27.8) Q12.3@20.479,27.8
  other v2: 7.2,5.4 2.775,10.95 1.25,11 2,11 1.25,11.75 2,11.75 2.75,11.75 2,12.5 2.75,12.5 1.225,12.525 34.598,19.25 35.723,19.25 33.625,19.275 9,19.45 29.825,21.125 33.425,29.375 34.525,29.375 35.7,29.4
  other v3: 23.125,6.05 33.25,9.425 35.325,9.425 34.275,9.45 23.025,15.35 22.9,23
MISO: P1.A4 U1.16 | length 5.4
  Top S.Layer w0.3: P1.A4 8,10.8 10.2,13 11.523,13 U1.16
MOSI: P1.A5 U1.15 | length 6.9
  Top S.Layer w0.3: P1.A5 7,11.2 9.613,13.813 U1.15
NetC2_2: C2.2 D1.1 R2.1 | length 4.8
  Top S.Layer w1: C2.2 32.404,26.367 32.404,25.622 R2.1 34.422,25.428 34.675,25.175 D1.1
NetC3_2: C3.2 D2.1 R4.1 | length 4.8
  Top S.Layer w1: C3.2 33.152,15.738 33.152,15.17 R4.1 33.359,14.963 35.338,14.963 D2.1
NetC4_2: C4.2 D3.1 R6.1 | length 4.7
  Top S.Layer w0.75: C4.2 32.652,6.73 R6.1 32.678,5.586 34.675,5.586 D3.1
NetP2_1: P2.A3 R22.2 | length 3.5
  Top S.Layer w0.4: P2.A3 5.648,19.58 6.368,20.3 7.799,20.3 R22.2
NetQ4_1: Q4.1 R1.2 | length 3
  Top S.Layer w1: R1.2 27.97,26.682 27.97,23.78 Q4.1
NetQ4_3: Q4.3 R2.2 R11.1 | length 4.8
  Top S.Layer w0.75: Q4.3 30.4,22.8 30.999,23.398 ; R2.2 31.201,23.601 30.999,23.398 ; R11.1 30.999,23.398
NetQ5_1: Q5.1 R3.2 | length 1.8
  Top S.Layer w1: R3.2 27.996,15.983 27.996,14.379 Q5.1
NetQ5_3: Q5.3 R4.2 R9.1 | length 4.8
  Top S.Layer w0.75: R4.2 31.755,14.781 31.755,14.68 30.45,13.375 Q5.3 30.301,13.324 32.499,13.324 R9.1
NetQ6_1: Q6.1 R5.2 | length 2.7
  Top S.Layer w1: Q6.1 28.005,3.982 28.005,6.628 R5.2
NetQ6_3: Q6.3 R6.2 R7.1 | length 5.7
  Top S.Layer w1: R6.2 30.193,4.498 Q6.3 30.393,3.02 31.092,3.718 R7.1
NetQ7_1: Q7.1 R7.2 | length 3.8
  Top S.Layer w0.75: v1(31.192,1.496) 31.249,1.553 31.821,1.553 R7.2
  Bottom S.Layer w0.5: Q7.1 30.642,3.184 31.192,2.634 v1(31.192,1.496)
NetQ8_1: Q8.1 R8.2 | length 4.6
  Top S.Layer w0.5: v1(24.5,6.3) 24.507,6.307 24.507,6.707 25.179,7.379 26.055,7.379 R8.2
  Bottom S.Layer w0.5: v1(24.5,6.3) 24.5,7.209 24.45,7.259 25,7.809 Q8.1
NetQ9_1: Q9.1 R9.2 | length 3.7
  Top S.Layer w0.75: v1(31.319,11.021) 31.376,11.078 31.752,11.078 R9.2
  Bottom S.Layer w0.75: Q9.1 30.894,12.658 31.319,12.233 v1(31.319,11.021)
NetQ10_1: Q10.1 R10.2 | length 5.4
  Top S.Layer w0.5: v1(24.25,15.775) 24.307,15.832 24.307,16.807 24.935,17.435 R10.2
  Bottom S.Layer w0.5: v1(24.25,15.775) 24.25,16.657 24.8,17.207 Q10.1
NetQ11_1: Q11.1 R11.2 | length 3.4
  Top S.Layer w0.75: v1(31.725,21.126) R11.2
  Bottom S.Layer w0.5: Q11.1 30.95,22.547 31.725,21.772 v1(31.725,21.126)
NetQ12_1: Q12.1 R12.2 | length 5.2
  Top S.Layer w0.5: v1(24.3,26.4) 24.357,26.457 24.357,27.107 25.165,27.915 26.042,27.915 R12.2
  Bottom S.Layer w0.4: v1(24.3,26.4) 24.3,27.333 24.9,27.933 Q12.1
PHASE_A: C4.1 Designator4.A1 Q7.3 Q8.2 R15.1 | length 144.3
  Top S.Layer w1: C4.1 Designator4.A1@37.3,7.745 ; 37.3,2.232 38.2,2.232 ; 37.3,2.232 37.3,4 Designator4.A1@38.2,4.9 ; 37.3,2.232 37,1.932 v1(37,1.5) v1(38.2,1.5) ; Designator4.A1@37.3,7.745 Designator4.A1@38.3,6.745 ; Designator4.A1@37.3,7.745 37.3,8.868 ; Designator4.A1@37.3,7.745 37.3,7 Designator4.A1 ; 37.3,8.868 37.5,8.668 38.3,8.668 ; 37.3,8.868 37.1,9.068 v1(37.1,9.5) v1(38.3,9.5) ; v1(38.2,1.5) 38.2,2.232 ; v1(38.2,1.5) v1(39.4,1.5) ; 38.2,2.232 39.4,2.232 ; 38.2,2.232 Designator4.A1@38.2,4.9 ; Designator4.A1@38.2,4.9 Designator4.A1 ; Designator4.A1@38.3,6.745 38.3,8.668 ; Designator4.A1@38.3,6.745 Designator4.A1@38.8,6.245 ; 38.3,8.668 39.5,8.668 ; 38.3,8.668 v1(38.3,9.5) ; v1(38.3,9.5) v1(39.5,9.5) ; Designator4.A1 Designator4.A1@39.4,4.9 ; Designator4.A1 40.3,7 40.3,8.668 ; Designator4.A1 Designator4.A1@38.8,6.245 ; Designator4.A1@38.8,6.245 39.5,6.945 39.5,8.668 ; v1(39.4,1.5) 39.4,2.232 ; v1(39.4,1.5) v1(40.7,1.5) 40.7,1.954 40.3,2.354 ; 39.4,2.232 40.178,2.232 40.3,2.354 ; 39.4,2.232 Designator4.A1@39.4,4.9 ; Designator4.A1@39.4,4.9 40.3,4 40.3,2.354 ; 39.5,8.668 40.3,8.668 ; 39.5,8.668 v1(39.5,9.5) ; v1(39.5,9.5) v1(40.7,9.5) 40.7,9.068 40.3,8.668
  Bottom S.Layer w1: Q8.2@25.4,3.209 Q8.2@26.01,3.209 ; Q8.2@25.4,3.209 Q8.2 25.1,3.209 24.8,3.509 24.8,4.814 25.386,5.4 25.5,5.4 25.7,5.6 26.4,5.6 ; Q8.2@25.4,3.209 Q8.2@25.7,3.509 ; Q8.2@25.7,3.509 Q8.2@26.31,3.509 ; Q8.2@25.7,3.509 25.7,4.9 26.4,5.6 ; Q8.2@26.01,3.209 Q8.2@26.31,3.509 ; Q8.2@26.01,3.209 27.889,3.209 R15.1 R15.1@27.891,3.539 ; Q8.2@26.31,3.509 26.692,3.892 26.692,3.967 27.077,4.353 ; Q8.2@26.31,3.509 26.31,4.119 27,4.809 27,5.6 ; 26.4,5.6 27,5.6 ; 27,5.6 28.092,5.6 ; 27.077,4.353 27.463,4.738 ; 27.077,4.353 R15.1@27.891,3.539 ; 27.463,4.738 28.3,4.738 ; 27.463,4.738 28.209,5.484 ; R15.1@27.891,3.539 27.891,4.328 28.3,4.738 ; 28.092,5.6 28.1,5.6 28.625,6.125 36.825,6.125 Q7.3@37.1,5.85 ; 28.092,5.6 28.209,5.484 ; 28.209,5.484 Q7.3 ; 28.3,4.738 28.412,4.85 36.832,4.85 Q7.3@37,5.018 ; 37,2.1 38.2,2.1 ; 37,2.1 Q7.3@37,5.018 ; 37,2.1 v1(37,1.5) v1(38.2,1.5) ; Q7.3@37,5.018 Q7.3 ; Q7.3@37.1,5.85 37.1,8.9 ; Q7.3@37.1,5.85 Q7.3 ; 37.1,8.9 38.3,8.9 ; 37.1,8.9 v1(37.1,9.5) v1(38.3,9.5) ; Q7.3 Q7.3@38.2,4.75 ; Q7.3 Q7.3@38.3,6.318 ; v1(38.2,1.5) 38.2,2.1 ; v1(38.2,1.5) v1(39.4,1.5) ; 38.2,2.1 39.4,2.1 ; 38.2,2.1 Q7.3@38.2,3.8 ; Q7.3@38.2,3.8 Q7.3@38.2,4.75 ; Q7.3@38.2,3.8 38.209,3.8 39.4,2.609 39.4,2.1 ; Q7.3@38.2,4.75 38.559,4.75 40.7,2.609 40.7,2.054 ; Q7.3@38.3,6.318 38.3,8.9 ; Q7.3@38.3,6.318 Q7.3@39.5,7.518 ; 38.3,8.9 39.5,8.9 ; 38.3,8.9 v1(38.3,9.5) ; v1(38.3,9.5) v1(39.5,9.5) ; v1(39.4,1.5) 39.4,2.1 ; v1(39.4,1.5) v1(40.7,1.5) 40.7,2.054 ; 39.4,2.1 40.654,2.1 40.7,2.054 ; Q7.3@39.5,7.518 39.5,8.9 ; Q7.3@39.5,7.518 39.859,7.518 40.7,8.359 40.7,8.9 ; 39.5,8.9 40.7,8.9 ; 39.5,8.9 v1(39.5,9.5) ; v1(39.5,9.5) v1(40.7,9.5) 40.7,8.9
PHASE_B: C3.1 Designator3.A1 Q9.3 Q10.2 R18.1 | length 156.6
  Top S.Layer w1: C3.1 Designator3.A1@37.529,17.105 ; Designator3.A1@37.529,17.105 Designator3.A1@38.4,16.234 ; Designator3.A1@37.529,17.105 v1@37.529,18.721 ; Designator3.A1@37.529,17.105 37.529,16.5 Designator3.A1 ; v1@37.529,18.721 v1@38.4,18.721 ; v1@37.529,18.721 v1(37.25,19) v1(38.4,19) ; v1(38.3,10.9) 38.3,11.7 ; v1(38.3,10.9) v1(39.5,10.9) ; v1(38.3,10.9) v1(37.1,10.9) 37.1,11.332 37.529,11.761 37.529,13.5 Designator3.A1@38.3,14.271 ; 38.3,11.7 Designator3.A1@38.3,14.271 ; 38.3,11.7 38.497,11.503 38.999,11.503 ; Designator3.A1@38.3,14.271 Designator3.A1@38.615,14.585 ; Designator3.A1@38.4,16.234 v1@38.4,18.721 ; Designator3.A1@38.4,16.234 Designator3.A1@39.029,15.605 ; v1@38.4,18.721 38.779,18.721 Designator3.A1@39.5,18 ; v1@38.4,18.721 v1(38.4,19) ; v1(38.4,19) v1(39.5,19) ; Designator3.A1@38.615,14.585 Designator3.A1@38.999,14.201 ; Designator3.A1@38.615,14.585 Designator3.A1@38.999,14.969 ; 38.999,11.503 39.5,11.503 ; 38.999,11.503 Designator3.A1@38.999,14.201 ; Designator3.A1@38.999,14.201 Designator3.A1@38.999,14.969 ; Designator3.A1@38.999,14.201 Designator3.A1@39.5,13.7 ; Designator3.A1@38.999,14.969 Designator3.A1 ; Designator3.A1 39.5,14.529 Designator3.A1@39.5,13.7 ; Designator3.A1 40.529,16.5 40.529,18.397 ; Designator3.A1 Designator3.A1@39.029,15.605 ; Designator3.A1@39.029,15.605 39.5,16.076 Designator3.A1@39.5,18 ; v1(39.5,10.9) 39.5,11.503 ; v1(39.5,10.9) v1(40.7,10.9) 40.7,11.332 40.529,11.503 ; 39.5,11.503 40.529,11.503 ; 39.5,11.503 Designator3.A1@39.5,13.7 ; Designator3.A1@39.5,13.7 40.529,12.671 40.529,11.503 ; Designator3.A1@39.5,18 39.897,18.397 40.529,18.397 ; Designator3.A1@39.5,18 v1(39.5,19) ; v1(39.5,19) v1(40.7,19) 40.7,18.568 40.529,18.397
  Bottom S.Layer w1: 28.293,13.77 28.847,14.325 36.909,14.325 Q9.3@37.1,14.516 ; Q10.2 25.05,12.607 24.5,13.157 24.5,13.43 26.5,15.43 26.5,15.372 ; Q10.2 26.01,12.607 Q10.2@26.074,12.672 ; Q10.2 Q10.2@25.374,12.672 ; Q10.2@25.374,12.672 25.5,12.798 25.5,14.372 25.793,14.665 ; Q10.2@25.374,12.672 Q10.2@26.074,12.672 ; 25.793,14.665 26.479,13.979 ; 25.793,14.665 26.086,14.958 ; Q10.2@26.074,12.672 Q10.2@26.31,12.907 ; Q10.2@26.074,12.672 R18.1 ; 26.086,14.958 26.5,14.958 ; 26.086,14.958 26.5,15.372 ; Q10.2@26.31,12.907 26.691,13.289 26.691,13.429 27.456,14.193 ; Q10.2@26.31,12.907 26.31,13.81 26.479,13.979 ; 26.479,13.979 26.5,13.958 26.5,14 ; 26.479,13.979 26.5,14 ; 26.5,14 26.75,14.25 26.75,14.555 27.153,14.958 ; 26.5,14 26.5,14.958 ; 26.5,14.958 27.153,14.958 ; 26.5,14.958 26.5,15.372 ; 26.5,15.372 26.678,15.55 36.95,15.55 Q9.3@37.25,15.25 ; 27.153,14.958 28.221,14.958 ; 27.456,14.193 28.221,14.958 ; 27.456,14.193 27.456,13.106 R18.1 ; R18.1 27.89,13.809 28.75,14.669 28.75,14.958 ; 28.221,14.958 28.75,14.958 ; 28.75,14.958 Q9.3 ; 37.1,11.5 38.3,11.5 ; 37.1,11.5 Q9.3@37.1,14.516 ; 37.1,11.5 v1(37.1,10.9) v1(38.3,10.9) ; Q9.3@37.1,14.516 Q9.3 ; Q9.3@37.25,15.25 37.25,18.4 ; Q9.3@37.25,15.25 Q9.3 ; 37.25,18.4 38.4,18.4 ; 37.25,18.4 v1(37.25,19) v1(38.4,19) ; Q9.3 Q9.3@38.3,14.2 ; Q9.3 37.825,14.958 40.7,17.833 40.7,18.417 ; Q9.3 38.4,15.816 Q9.3@38.4,16.8 ; v1(38.3,10.9) 38.3,11.5 ; v1(38.3,10.9) v1(39.5,10.9) ; 38.3,11.5 39.5,11.5 ; 38.3,11.5 Q9.3@38.3,14.2 ; Q9.3@38.3,14.2 38.583,14.2 40.7,12.083 40.7,11.492 ; Q9.3@38.3,14.2 39.5,13 39.5,11.5 ; Q9.3@38.4,16.8 38.4,18.4 ; Q9.3@38.4,16.8 38.467,16.8 39.5,17.833 39.5,18.4 ; 38.4,18.4 39.5,18.4 ; 38.4,18.4 v1(38.4,19) ; v1(38.4,19) v1(39.5,19) ; v1(39.5,10.9) 39.5,11.5 ; v1(39.5,10.9) v1(40.7,10.9) 40.7,11.492 ; 39.5,11.5 40.692,11.5 40.7,11.492 ; 39.5,18.4 40.683,18.4 40.7,18.417 ; 39.5,18.4 v1(39.5,19) ; v1(39.5,19) v1(40.7,19) 40.7,18.417
PHASE_C: C2.1 Designator2.A1 Q11.3 Q12.2 R21.1 | length 146.6
  Top S.Layer w1: C2.1 34.9,27.3 Designator2.A1@37.4,27.3 ; 37.4,21.432 38.4,21.432 ; 37.4,21.432 37.4,23.3 Designator2.A1@38.4,24.3 ; 37.4,21.432 37.2,21.232 v1(37.2,20.8) v1(38.4,20.8) ; Designator2.A1@37.4,27.3 Designator2.A1@38.4,26.3 ; Designator2.A1@37.4,27.3 37.4,28.268 ; Designator2.A1@37.4,27.3 37.4,26.3 Designator2.A1 ; 37.4,28.268 38.4,28.268 ; 37.4,28.268 37.2,28.468 v1(37.2,28.9) v1(38.4,28.9) ; v1(38.4,20.8) 38.4,21.432 ; v1(38.4,20.8) v1(39.5,20.8) ; 38.4,21.432 39.432,21.432 39.5,21.5 ; 38.4,21.432 Designator2.A1@38.4,24.3 ; Designator2.A1@38.4,24.3 Designator2.A1 ; Designator2.A1@38.4,26.3 38.4,28.268 ; Designator2.A1@38.4,26.3 Designator2.A1@38.9,25.8 ; 38.4,28.268 39.032,28.9 ; 38.4,28.268 39.668,28.268 39.7,28.3 ; 38.4,28.268 v1(38.4,28.9) ; v1(38.4,28.9) 39.032,28.9 ; Designator2.A1 Designator2.A1@39.5,24.2 ; Designator2.A1 40.4,26.3 40.4,28.5 v1(40.8,28.9) v1(39.7,28.9) ; Designator2.A1 Designator2.A1@38.9,25.8 ; Designator2.A1@38.9,25.8 39.7,26.6 39.7,28.3 ; 39.032,28.9 v1(39.7,28.9) ; v1(39.5,20.8) 39.5,21.5 ; v1(39.5,20.8) v1(40.7,20.8) 40.7,21.232 40.4,21.532 40.4,23.3 Designator2.A1@39.5,24.2 ; 39.5,21.5 Designator2.A1@39.5,24.2 ; 39.7,28.3 v1(39.7,28.9)
  Bottom S.Layer w1: 28.452,24.101 R21.1@27.984,23.633 ; 28.9,24.25 36.953,24.25 Q11.3@37.2,24.497 ; Q12.2@25,23.633 Q12.2@26,23.633 ; Q12.2@25,23.633 25,24.664 ; Q12.2@25,23.633 25.3,23.333 Q12.2 ; 25,24.664 25.832,25.496 33.601,25.496 Q11.3@34.25,24.847 ; 25,24.664 26,24.664 ; Q12.2 Q12.2@25.412,23.437 ; Q12.2 Q12.2@25.7,23.333 ; Q12.2@25.412,23.437 Q12.2@25.804,23.437 ; Q12.2@25.412,23.437 25.512,23.537 Q12.2@25.904,23.537 ; Q12.2@25.7,23.333 Q12.2@25.804,23.437 ; Q12.2@25.7,23.333 26.008,23.333 Q12.2@26.112,23.437 ; Q12.2@25.804,23.437 Q12.2@26.112,23.437 ; Q12.2@25.804,23.437 Q12.2@25.904,23.537 ; Q12.2@25.904,23.537 Q12.2@26,23.633 ; Q12.2@25.904,23.537 Q12.2@26.212,23.537 ; Q12.2@26,23.633 Q12.2@26.308,23.633 ; Q12.2@26,23.633 26,24.664 ; 26,24.664 26.761,24.664 26.91,24.515 ; Q12.2@26.112,23.437 27.788,23.437 R21.1 ; Q12.2@26.112,23.437 Q12.2@26.212,23.537 ; Q12.2@26.212,23.537 Q12.2@26.308,23.633 ; Q12.2@26.212,23.537 R21.1 ; Q12.2@26.308,23.633 26.689,24.015 26.689,24.294 26.91,24.515 ; Q12.2@26.308,23.633 R21.1@27.792,23.633 ; 26.91,24.515 R21.1@27.75,23.675 ; 26.91,24.515 27.242,24.847 27.75,24.847 ; R21.1@27.75,23.675 R21.1@27.792,23.633 ; R21.1@27.75,23.675 27.75,24.847 ; 27.75,24.847 Q11.3@34.25,24.847 ; R21.1@27.792,23.633 R21.1@27.984,23.633 ; R21.1@27.792,23.633 R21.1 ; R21.1 R21.1@27.984,23.633 ; Q11.3@34.25,24.847 Q11.3 ; 37.2,21.4 38.4,21.4 ; 37.2,21.4 Q11.3@37.2,24.497 ; 37.2,21.4 v1(37.2,20.8) v1(38.4,20.8) ; Q11.3@37.2,24.497 Q11.3 ; 37.2,28.3 38.4,28.3 ; 37.2,28.3 v1(37.2,28.9) v1(38.4,28.9) ; 37.2,28.3 37.2,25.197 Q11.3 ; Q11.3 Q11.3@38.4,23.997 ; Q11.3 Q11.3@38.752,26.048 ; Q11.3 37.925,24.847 40.8,27.722 40.8,28.3 ; v1(38.4,20.8) 38.4,21.4 ; v1(38.4,20.8) v1(39.5,20.8) ; 38.4,21.4 39.5,21.4 ; 38.4,21.4 Q11.3@38.4,23.997 ; Q11.3@38.4,23.997 38.675,23.997 40.7,21.972 40.7,21.386 ; Q11.3@38.4,23.997 39.5,22.897 39.5,21.4 ; 38.4,28.3 39.7,28.3 ; 38.4,28.3 v1(38.4,28.9) ; 38.4,28.3 38.4,26.4 Q11.3@38.752,26.048 ; v1(38.4,28.9) v1(39.7,28.9) ; Q11.3@38.752,26.048 39.7,26.997 39.7,28.3 ; v1(39.5,20.8) 39.5,21.4 ; v1(39.5,20.8) v1(40.7,20.8) 40.7,21.386 ; 39.5,21.4 40.686,21.4 40.7,21.386 ; 39.7,28.3 40.8,28.3 ; 39.7,28.3 v1(39.7,28.9) ; v1(39.7,28.9) v1(40.8,28.9) 40.8,28.3
PWM_IN: C9.2 R22.1 U1.30 U1.32 | length 23.1
  Top S.Layer w0.3: U1.30 20.193,17.071 20.839,17.071 21.29,17.522 21.29,18.105 21.225,18.17 ; U1.32 20.193,18.556 20.839,18.556 21.225,18.17 ; v1(21.225,21.175) 21.225,18.17
  Top S.Layer w0.4: R22.1 C9.2 8.562,17.962 9.162,17.962 v2(9.2,18)
  Bottom S.Layer w0.4: v2(9.2,18) 9.208,18 11.854,20.646 20.696,20.646 v1(21.225,21.175)
RESET: P1.A6 R30.1 U1.29 | length 27.5
  Top S.Layer w0.3: P1.A6 6,11.6 9,14.6 v2(10.2,14.6) ; U1.29 21.113,16.213 23.252,18.352 23.252,19.275 R30.1 23.339,19.387 22.212,19.387 v2(22.2,19.4)
  Bottom S.Layer w0.3: v2(10.2,14.6) 10.2,14.85 10.979,15.629 14.05,18.7 14.738,19.388 22.188,19.388 v2(22.2,19.4)
SCK: P1.A3 U1.17 | length 4.8
  Top S.Layer w0.3: P1.A3 9,10.137 10.376,11.513 U1.17
SENSE_A: C1.1 C6.1 R13.2 R14.2 R15.2 U1.23 | length 39.3
  Top S.Layer w0.4: U1.23 17.843,11.506 17.843,9.557 v2(17.85,9.55)
  Bottom S.Layer w0.4: v2(17.85,9.55) 17.796,9.55 17.584,9.338 14.376,9.338 14.11,9.072 14.11,8.344 13.585,7.818 11.915,7.818 11.674,8.059 11.145,8.059 C1.1 10.9,4.8 11.4,4.3 14.9,0.8 26.877,0.8 R15.2
  Bottom S.Layer w1: R13.2 C6.1@8.729,8.702 ; R14.2 8.599,8.572 C6.1@8.729,8.702 ; C1.1 10.342,8.304 10.092,8.554 9.104,8.554 C6.1 C6.1@8.729,8.702
SENSE_B: C1.2 C8.1 R16.2 R17.2 R18.2 U1.22 | length 25.8
  Top S.Layer w0.4: v2(16.972,10.228) 17.018,10.274 17.018,11.495 U1.22
  Bottom S.Layer w0.4: R17.2 12.82,11.078 16.694,11.078 16.972,10.8 ; v2(16.972,10.228) 16.972,10.8 ; R18.2 27.693,11.078 17.25,11.078 16.972,10.8
  Bottom S.Layer w1: R16.2 10.314,10.502 C1.2@10.9,9.917 ; C1.2 C1.2@10.9,9.917 ; R17.2 11.305,11.199 C8.1 C1.2@10.9,9.917
SENSE_C: C6.2 C8.2 R19.2 R20.2 R21.2 U1.19 | length 34.5
  Top S.Layer w0.4: v2(13.925,13.4) 14.636,12.689 U1.19
  Bottom S.Layer w0.4: R20.2 10.375,15.879 10.375,16.375 13.446,19.446 13.992,19.992 21.292,19.992 23.25,21.95 27.698,21.95 R21.2 ; C8.2 13.472,13.001 13.871,13.4 v2(13.925,13.4)
  Bottom S.Layer w1: R19.2 C6.2@8.785,12.302 ; R20.2 8.799,12.316 C6.2@8.785,12.302 ; C8.2 10.342,13.001 9.847,12.507 9.104,12.507 C6.2 C6.2@8.785,12.302
VBAT: C11.2 C15.2 C16.A1 D1.2 D2.2 D3.2 Designator7.A1 Q1.3 Q2.1 Q7.2 Q9.2 Q11.2 R27.2 | length 125
  Top S.Layer w1: 4.3,6.7 3.7,6.7 v2(3.2,6.2) ; Q2.1 Q2.1@5.302,6.763 ; Designator7.A1@12.664,28.164 12.5,28.328 12.5,29.305 ; Designator7.A1 13.4,29.3 12.505,29.3 12.5,29.305 ; R27.2 26.1,10.3 v1(27.1,9.3) ; C16.A1@2.2,22.333 C16.A1@2.3,22.433 ; C16.A1@2.2,22.333 C16.A1 ; C16.A1@2.2,22.333 1.7,22.833 v1(1.7,24.1) 2.3,24.1 ; C16.A1 C16.A1@2.3,22.433 ; C16.A1 2.4,22.333 C16.A1@2.9,22.833 ; C16.A1@2.3,22.433 2.3,24.1 ; C16.A1@2.3,22.433 2.7,22.833 C16.A1@2.9,22.833 ; 2.3,24.1 v1(2.9,24.1) ; v2(2.4,28.1) 2.5,28.2 v2@2.6,28.2 ; v2(2.4,28.1) 2.5,28.1 v2@2.6,28.2 ; v2(2.4,28.1) v2(2.4,29.3) v2(3.7,29.3) ; v2@2.6,28.2 v2(3.7,29.3) ; v2@2.6,28.2 v2(3.7,28.2) ; C16.A1@2.9,22.833 4.233,22.833 v1(4.3,22.9) 3.1,24.1 v1(2.9,24.1) ; C16.A1@2.9,22.833 v1(2.9,24.1) ; v2(3.2,6.2) v2(3.2,7) 3.2,7.1 v2(3.8,7.7) 4.365,7.7 Q2.1@5.302,6.763 ; v2(3.2,6.2) 3.4,6.2 v2(3.9,5.7) 4.239,5.7 Q2.1@5.302,6.763 ; v2(3.7,28.2) v2(4.8,29.3) ; v2(3.7,28.2) v2(3.7,29.3) ; v2(3.7,28.2) v2(4.8,28.2) v2(6,28.2) ; v2(3.7,29.3) v2(4.8,29.3) ; v2(4.8,29.3) v2@4.9,29.3 ; v2@4.9,29.3 v2(6,28.2) ; v2@4.9,29.3 v2(6,29.3) ; v2(6,28.2) 6.7,28.9 6.7,29.3 ; v2(6,28.2) 6.9,28.2 ; v2(6,28.2) v2(6,29.3) ; v2(6,29.3) 6.7,29.3 ; 6.7,29.3 8,29.3 ; 6.9,28.2 8,29.3 ; 6.9,28.2 8.271,28.2 ; 8,29.3 9.371,29.3 ; 8.271,28.2 9.203,28.2 C11.2@9.574,27.829 ; 8.271,28.2 8.886,28.814 ; 8.271,28.2 Q1.3 C11.2@9.574,27.829 ; 8.886,28.814 9.371,29.3 ; 8.886,28.814 9.197,28.814 C11.2 ; 9.371,29.3 9.403,29.332 10.518,29.332 ; 9.371,29.3 10.487,29.3 ; C11.2@9.574,27.829 C11.2 ; C11.2 9.878,28.691 10.487,29.3 ; 10.487,29.3 10.518,29.332 ; 10.518,29.332 12.474,29.332 12.5,29.305 ; v1(34.225,10.475) v1(35.325,10.475) 35.325,11.2 35.425,11.3 35.3,11.425 35.375,11.5 35.338,11.538 D2.2@35.35,11.55 ; v1(34.225,10.475) 34.15,10.55 v1(33.125,10.55) 33.25,10.55 34.4,11.7 35.25,11.7 D2.2 D2.2@35.35,11.55 ; v1(34.225,10.475) 34.275,10.475 D2.2@35.35,11.55 ; v1(34.7,1.3) v1(35.7,1.3) 35.7,1.461 D3.2 D3.2@34.7,2.3 ; v1(34.7,1.3) v1(33.7,1.3) D3.2@34.7,2.3 ; v1(34.7,1.3) D3.2@34.7,2.3 ; v1(34.7,20.5) v1(35.8,20.5) 35.8,20.925 D1.2 ; v1(34.7,20.5) v1(33.6,20.5) 33.6,20.925 D1.2 ; v1(34.7,20.5) D1.2
  Bottom S.Layer w1: Q11.2@31.75,26.75 31.825,26.825 v1(31.825,29.17) ; v1(29.285,29.17) 30.455,28 ; v1(29.285,29.17) v1(30.555,29.17) ; v1(29.285,29.17) 29.285,28.417 29.555,28.147 29.555,27.447 29.855,27.147 Q11.2@30.255,27.147 ; 29.414,8.84 v1(29.414,9.37) v1(30.557,9.37) ; 29.414,8.84 29.414,8.627 Q7.2@29.47,8.57 ; 29.414,8.84 29.47,8.784 Q7.2@29.47,8.57 ; v1(29.414,18.895) 30.059,18.25 30.684,18.25 ; v1(29.414,18.895) v1(30.684,18.895) ; v1(29.414,18.895) 29.414,18.391 29.547,18.258 29.547,17.558 29.847,17.258 Q9.2 ; Q7.2@29.47,8.57 29.757,8.57 v1(30.557,9.37) ; Q7.2@29.47,8.57 29.47,8.084 29.77,7.784 Q7.2@30.257,7.784 ; Q11.2@30.255,27.147 30.555,27.447 30.555,28 ; Q11.2@30.255,27.147 Q11.2 31.255,27.147 31.555,27.447 31.555,28.4 ; Q7.2@30.257,7.784 30.557,8.084 v1(30.557,9.37) ; Q7.2@30.257,7.784 Q7.2 31.17,7.784 31.47,8.084 31.47,8.784 31.573,8.886 v1(31.573,9.37) v1(30.557,9.37) ; 30.455,28 30.555,28 ; 30.455,28 30.555,28.1 ; Q9.2 30.684,17.395 30.684,18.25 ; Q9.2 31.247,17.258 31.547,17.558 31.547,18.258 31.954,18.665 v1(31.954,18.895) v1(30.684,18.895) ; 30.555,28 30.555,28.1 ; 30.555,28.1 v1(30.555,29.17) ; 30.555,28.1 30.855,28.4 31.555,28.4 ; v1(30.555,29.17) v1(31.825,29.17) ; 30.684,18.25 v1(30.684,18.895) ; 31.555,28.4 31.555,28.9 v1(31.825,29.17) ; v2(3.2,6.2) v2(3.2,7) 3.8,7.6 v2(3.8,7.7) 3.9,7.6 v2(3.9,5.7) 3.4,6.2 v2(3.2,6.2)
XTAL1: C17.2 U1.7 XT1.1 | length 9.5
  Top S.Layer w0.254: U1.7@13.839,20.116 U1.7 13.836,21.758 14.888,22.81 15.203,22.81 15.823,23.43 15.823,24.907 16.33,25.415 16.469,25.415 XT1.1 18.879,25.888 C17.2
XTAL2: C18.2 U1.8 XT1.3 | length 6.8
  Top S.Layer w0.254: C18.2 12.912,24.188 XT1.3@14.642,24.188 ; U1.8@13.039,20.116 U1.8 13,20.149 13,22.446 14.169,23.615 14.169,23.715 XT1.3@14.642,24.188 ; XT1.3 XT1.3@14.642,24.188
pads on no net: U1.1 U1.11 U1.13 U1.14 U1.31

## Polygon pours and split planes (outlines as drawn)
GND on Bottom S.Layer "Bottom S.Layer-GND" (solid, remove dead copper, pour order 2): 0,30.5 41.9,30.5 41.9,0 0,0
GND on Top S.Layer "Top S.Layer-GND" (solid, remove dead copper, pour order 0): 0,30.5 41.9,30.5 41.9,0 0,0
GND on GND (split plane): 41.402,29.97 41.402,0.51 0.51,0.51 0.51,29.97
VBAT on VCC (split plane): 41.402,29.97 41.402,0.51 0.51,0.51 0.51,29.97
+5V on VCC (split plane): 11.537,23.63 12.327,22.84 12.379,22.8 12.44,22.775 12.506,22.766 26.811,22.766 26.889,15.296 19.321,7.727 11.779,7.727 8.952,10.554 8.952,21.571 11.508,23.668
VBAT on VCC (split plane): 19.967,23.271 19.959,23.271 19.967,23.276

## Other copper
Top S.Layer:
  pour cut-out: 10.613,25.493 12.721,27.6 20.136,27.6 20.136,23.3 11.324,23.3 10.613,23.934
GND (plane layer: these items are gaps in the copper):
  lines w0.5: 11.7,24.9 11.7,23.9 13,22.9 20.2,22.9 20.2,27.3 13.1,27.3 11.7,26.2
VCC (plane layer: these items are gaps in the copper):
  lines w0.5: 11.716,25 11.716,25.1 11.7,25.116 11.7,26.2 13.1,27.3 20.2,27.3 20.221,23.018 ; 12.6,24.7 13.187,27.048 19.949,27.048 19.9,26.7 ; 8.7,10.45 11.675,7.475 19.425,7.475 27.142,15.192 27.06,23.018 12.506,23.018 11.716,23.808 11.716,24.165 8.7,21.69 8.7,10.45
  lines w2: 12.3,26 19.4,26 19.4,24.1 12.8,24.2 12.6,24.7

## Silkscreen, mask and mechanical layers (free items; w line width, h text height)
Top Overlay:
  rectangle: 34.1,3.325 35.3,4.725
  rectangle: 34.75,12.65 35.95,14.075
  rectangle: 34.075,22.9 35.3,24.3
  region: 34.15,4.65
  text "<--- VBAT" at 15.825,28.525 h0.5
  text "-" at 34.925,24.925 h0.5 r90
  text "Phase-C" at 29.05,24.85 h0.5 r70
  text "+" at 34.4,21.75 h0.5
  text "PWM" at 2.475,18.875 h0.5 r90
  text "Cap + --->" at 1.05,17.1 h0.5 r90
  text "GND" at 2.025,16.275 h0.5 r90
  text "Phase-B" at 29.35,15.125 h0.5 r70
  text "-" at 35.525,14.75 h0.5 r90
  text "+5V" at 2.5,13.7 h0.5 r90
  text "-SPI-" at 6.875,13.325 h0.5
  text "+" at 35.05,11.525 h0.5
  text "MISO" at 8.4,11 h0.5 r90
  text "MOSI" at 7.375,10.975 h0.5 r90
  text "GND" at 10.375,10.975 h0.5 r90
  text "SCLK" at 9.375,10.95 h0.5 r90
  text "+5V" at 11.4,10.925 h0.5 r90
  text "RESET" at 4.975,8.675 h0.5 r90
  text "-" at 34.925,5.325 h0.5 r90
  text "Phase-A" at 29.2,4.925 h0.5 r70
  text "GND -->" at 16.175,2.5 h0.5
  text "+" at 34.45,2.15 h0.5
Bottom Overlay:
  text "Designed" at 10.875,28.225 h0.5
  text "by" at 7.95,27.375 h0.5
  text "Yaswanth Chalamalasetti" at 8.9,25.775 h0.5
  text "Electronic" at 8.375,20.2 h0.5
  text "Speed" at 7.8,18.975 h0.5
  text "Controller" at 7.275,18.075 h0.5
  text "Cap -  -->" at 0.025,17.15 h0.5 r270
  text "(Rev.A)" at 6.475,17.125 h0.5
Drill Drawing:
  circle w0.254: c-2.679,-33.373 r0.847
  lines w0.025: 58.691,-8.227 63.584,-3.333 ; 58.691,-6.703 62.06,-3.333 ; 58.69,-5.179 60.536,-3.333 ; 58.69,-3.655 59.012,-3.333 ; 59.818,-8.623 65.108,-3.333 ; 61.342,-8.623 65.928,-4.038 ; 62.866,-8.623 65.928,-5.562 ; 64.39,-8.623 65.928,-7.086
  lines w0.254: -4.808,1.274 -4.3,-0.25 ; -4.808,28.726 -4.3,30.25 ; -4.554,-0.25 -4.046,-0.25 -0.2,-0.3 ; -4.554,30.25 -4.046,30.25 -0.2,30.3 ; -4.3,10.404 -4.3,-0.25 ; -4.3,19.596 -4.3,30.25 ; -3.792,1.274 -4.3,-0.25 ; -3.792,28.726 -4.3,30.25 ; -3.526,-28.717 -1.832,-28.717 -2.679,-30.41 -3.526,-28.717 ; -3.526,-26.6 -1.832,-26.6 -1.832,-24.907 -3.526,-24.907 -3.526,-26.6
  lines w0.381: -5.044,-35.363 142.896,-35.363 ; -5.044,-23.933 142.896,-23.933 ; 8.948,-39.173 8.948,-20.123 ; 23.93,-39.173 23.93,-20.123 ; 51.608,-39.173 51.608,-20.123 ; 58.691,3.512 69.102,3.512 92.718,3.512 114.556,3.512 131.062,3.512 ; 58.691,6.56 69.102,6.56 92.718,6.56 114.556,6.56 131.062,6.56 ; 58.691,9.608 69.102,9.608 92.718,9.608 114.556,9.608 131.062,9.608 ; 58.691,12.656 69.102,12.656 92.718,12.656 114.556,12.656 131.062,12.656 ; 58.691,15.704 69.102,15.704 92.718,15.704 114.556,15.704 131.062,15.704 ; 58.691,18.752 69.102,18.752 92.718,18.752 114.556,18.752 131.062,18.752 ; 58.691,21.8 69.102,21.8 92.718,21.8 114.556,21.8 131.062,21.8 ; 58.691,24.848 69.102,24.848 92.718,24.848 114.556,24.848 131.062,24.848 ; 58.691,27.896 69.102,27.896 92.718,27.896 114.556,27.896 131.062,27.896 ; 58.691,30.944 69.102,30.944 92.718,30.944 114.556,30.944 131.062,30.944 ; 58.691,33.992 131.062,33.992 ; 64.457,-39.173 64.457,-20.123 ; 69.102,37.04 69.102,0.464 ; 83.096,-39.173 83.096,-20.123 ; 92.718,37.04 92.718,0.464 ; 114.556,37.04 114.556,0.464 ; 126.77,-39.173 126.77,-20.123 ; 69.102,0.464 58.691,0.464 58.691,37.04 131.062,37.04 131.062,0.464 114.556,0.464 ; 69.102,0.464 92.718,0.464 ; 92.718,0.464 114.556,0.464 ; -5.044,-39.173 142.896,-39.173 142.896,-20.123 -5.044,-20.123 -5.044,-39.173 ; 58.691,-8.61 65.928,-8.609 65.928,-3.346 58.69,-3.346 58.691,-8.61
  text "FABRICATION NOTES" at 203.2,72 h2
  text "LAYER STACK TABLE" at 76.9,40.3 h2
  text "PCB Dimentions: 42mm x 30.5mm" at -7.5,40.2 h2
  text "Layer" at 60.469,34.754 h1.52
  text "Name" at 70.88,34.754 h1.52
  text "Material" at 94.496,34.754 h1.52
  text "Thickness" at 116.334,34.754 h1.52
  text "Top Overlay" at 70.88,31.706 h1.52
  text "Top Solder" at 70.88,28.658 h1.52
  text "Solder Resist" at 94.496,28.658 h1.52
  text "0.010mm" at 116.334,28.658 h1.52
  text "1" at 60.469,25.61 h1.52
  text "Top S.Layer" at 70.88,25.61 h1.52
  text "Copper" at 94.496,25.61 h1.52
  text "0.035mm" at 116.334,25.61 h1.52
  text "Dielectric 2" at 70.88,22.562 h1.52
  text "7628H" at 94.496,22.562 h1.52
  text "0.200mm" at 116.334,22.562 h1.52
  text "2" at 60.469,19.514 h1.52
  text "GND" at 70.88,19.514 h1.52
  text "Copper" at 94.496,19.514 h1.52
  text "0.018mm" at 116.334,19.514 h1.52
  text "Dielectric 1" at 70.88,16.466 h1.52
  text "FR-4" at 94.496,16.466 h1.52
  text "1.065mm" at 116.334,16.466 h1.52
  text "3" at 60.469,13.418 h1.52
  text "VCC" at 70.88,13.418 h1.52
  text "Copper" at 94.496,13.418 h1.52
  text "0.018mm" at 116.334,13.418 h1.52
  text "30.5mm" at -3.386,10.658 h1.52 r90
  text "Dielectric 3" at 70.88,10.37 h1.52
  text "7628H" at 94.496,10.37 h1.52
  text "0.200mm" at 116.334,10.37 h1.52
  text "4" at 60.469,7.322 h1.52
  text "Bottom S.Layer" at 70.88,7.322 h1.52
  text "Copper" at 94.496,7.322 h1.52
  text "0.035mm" at 116.334,7.322 h1.52
  text "Bottom Solder" at 70.88,4.274 h1.52
  text "Solder Resist" at 94.496,4.274 h1.52
  text "0.010mm" at 116.334,4.274 h1.52
  text "Bottom Overlay" at 70.88,1.226 h1.52
  text "Total board thickness:" at 60.469,-1.822 h1.52
  text "1.591mm" at 116.334,-1.822 h1.52
  text "DRILL TABLE" at 58,-16.6 h2
  text "Symbol" at -2.758,-22.79 h1.83
  text "Count" at 10.091,-22.79 h1.83
  text "Hole Size" at 25.073,-22.79 h1.83
  text "Plated" at 52.751,-22.79 h1.83
  text "Hole Type" at 65.6,-22.79 h1.83
  text "Drill Layer Pair" at 84.239,-22.79 h1.83
  text "Via/Pad" at 127.913,-22.79 h1.83
  text "6" at 10.091,-26.6 h1.52
  text "0.200mm (7.87mil)" at 25.073,-26.6 h1.52
  text "PTH" at 52.751,-26.6 h1.52
  text "Round" at 65.6,-26.6 h1.52
  text "Top S.Layer - Bottom S.Layer" at 84.239,-26.6 h1.52
  text "Via" at 127.913,-26.6 h1.52
  text "68" at 10.091,-30.41 h1.52
  text "0.300mm (11.81mil)" at 25.073,-30.41 h1.52
  text "PTH" at 52.751,-30.41 h1.52
  text "Round" at 65.6,-30.41 h1.52
  text "Top S.Layer - Bottom S.Layer" at 84.239,-30.41 h1.52
  text "Via" at 127.913,-30.41 h1.52
  text "81" at 10.091,-34.22 h1.52
  text "0.400mm (15.75mil)" at 25.073,-34.22 h1.52
  text "PTH" at 52.751,-34.22 h1.52
  text "Round" at 65.6,-34.22 h1.52
  text "Top S.Layer - Bottom S.Layer" at 84.239,-34.22 h1.52
  text "Via" at 127.913,-34.22 h1.52
  text "155 Total" at 10.091,-38.03 h1.52
  text "1.  FABRICATE PER ANSI/IPC-A-600,IPC-QE-605, IPC-4101,IPC-4552 AND IPC-SM-840 SPECIFICATIONS.  / 2.  MATERIAL: BASE MATERIAL LAMINATED EPOXY GLASS NEMA GRADE FR-4, NOM .062\", COLOR NATURAL.   /     NOM 1 OZ COPPER WEIGHT.   THICKNESS .070\" MAX AFTER PLATING AND FINISHING.   /     PREFER ROHS COMPLIANT PER IPC-4101 SLASH SHEETS #26 OR #83 OR #98 WITH  /     MINIMUM TG 135 DEGREE C OR HIGHER, TD 300 DEGREE C OR HIGHER AND FLAME RATED UL 94V-0. / 3.  ALL DIMENTIONS ARE IN INCHES UNLESS OTHERWISE SPECIFIED / 4.  DIMENSIONAL TOLERANCES ARE: .XX=+/- .01; .XXX=+/-.005; / 5.  TOTAL THICHNESS OF PCB AFTER PLATING SHALL BE 0.0618\" +/- 0.005\" / 6.  SOLDERMASK BOTH SIDES OF BOARD OVER BARE COPPER WITH MATERIAL PER ANSI/IPC-SM-840,  /     COLOR SHALL BE GREEN AND SOLVENT FREE / 7.  APPLY SOLDER PLATING WITH HOT-AIR LEVELING TO EXPOSED COPPER BOTH SIDES.   /     LEAD-FREE SOLDER PREFERRED; LEADED SOLDER ACCEPTABLE. / 8.  APPLY SILKSCREEN TO TOP SIDE OF BOARD USING NON-CONDUCTIVE WHITE EPOXY INK. NO INK SHALL  /     BE ON EXPOSED PADS / 9.  SEE SEPARATE DRILL FILE FOR HOLE LOCATIONS.   / 10.  HOLE LOCATIONS SPECIFIED IN SEPARATE DRILL FILE TAKE PRECEDENCE OVER THIS DWG AND ARTWORK.  /      CONTACT IIT BHUBANESWAR TO RESOLVE DIMENSION CONFLICTS BETWEEN DWG AND ARTWORK. /      NO ALTERATIONS TO GERBER FLES WITHOUT PRIOR CONSENT FROM IIT BHUBANESWAR / 11.  HOLE SIZES ARE SPECIFIED AS FINAL DIMENSIONS AFTER PLATING AND FINISHING.   /      UNLESS OTHERWISE SPECIFIED ALL HOLES TO BE PLATED.  / 12.  VENDOR TO PLATE HOLES AND EXPOSED PADS. /      VENDOR TO SPECIFY TYPE OF PLATING MATERIAL TO BE USED WHEN ACCEPTING ORDER. / 13.  IT IS VENDOR'S RESPONSIBILITY TO SELECT THE BASE MATERIAL TO YIELD THE SPECIFIED IMPEDENCE  /      CHARACTERISTICS TO WITHIN +/-10% / 14.  ALL HOLES SHALL BE LOCATED WITHIN 0.003\" DIAMETER OF TRUE POSITION OR OTHER TRUE POSITION / 15.  WARP OR TWIST OF BOARD SHALL NOT EXCEED 0.01 INCH PER INCH / 16.  REMOVE ALL BURRS AND BREAK SHARP EDGES 0.015\" MAX / 17.  PLATED THRU HOLES & EXPOSED PADS SHALL BE TIN/LEAD PLATED 0.0003\" TO 0.0005\" THICK / 18.  ONLY VENDOR IDENTIFICATION MARK & ORDER NUMBER CAN BE ADDED ONLY AT THE SPECIFIED LOCATION  /      (UNDER THE IC). AFTER ASSEMBLY IT SHOULD NOT APPEAR OUTSIDE / 19.  MANUFACTURER SHOULD NOT ADD ANY OTHER DATA EXCEPT ABOVE MENTIONED LIKE NAME, LOGO, DATE CODE,  /      UL LISTING OR ANY OTHER MARKING TO ANY VISIBLE LAYER / 20.  AFTER ASSEMBLY TRIM SOLDER FILLETS AND COMPONENT LEADS TO 0.06\" (MAX)  /      BEYOND BOARD SURFACE ON BOTTOM SIDE. / 21.  BOARDS MUST PASS VISUAL INSPECTION PER IPC-A-600 CLASS 2 / 22.  FINISHED BOARD MUST MEET UL94V-0 RATING AND ROHS COMPLIANCE / 23.  DOCUMENTATION THAT MUST BE DELIVERED WITH BOARDS: /         - CROSS SECTION REPORT (SPACING BETWEEN COPPER LAYERS AND COPPER THICHNESS) /         - ELECTRICAL TEST CERTIFICATION OF COMPILANCE (ACC. TO IPC-ET-652 CLASS 2) /         - CERTIFICATION OF COMPILANCE (BOARD HAS BEEN MANUFACTURED TO DRAWING REQUIREMENTS) /         - ROHS CERTIFICATION OF COMPILANCE" at 151.4,-38.9 h1.5

## Dimensions
0,30.5 to 42,30.825 on Drill Drawing

## Text inside footprints (layer, text, board x,y; h text height)
Q7: Bottom Overlay "S" at 29.414,5.814 h1.52 r270; Bottom Overlay "G" at 28.957,4.214 h1.52 r270
Q8: Bottom Overlay "S" at 26.366,5.179 h1.52 r90; Bottom Overlay "G" at 26.493,6.83 h1.52 r90
Q9: Bottom Overlay "S" at 29.033,15.466 h1.52 r270; Bottom Overlay "G" at 29.033,13.688 h1.52 r270
Q10: Bottom Overlay "S" at 26.366,14.577 h1.52 r90; Bottom Overlay "G" at 26.318,16.304 h1.52 r90
Q11: Bottom Overlay "S" at 29.158,25.341 h1.52 r270; Bottom Overlay "G" at 29.118,23.653 h1.52 r270
Q12: Bottom Overlay "S" at 26.364,25.303 h1.52 r90; Bottom Overlay "G" at 26.377,26.967 h1.52 r90